# Allegro board XS6-9.brd
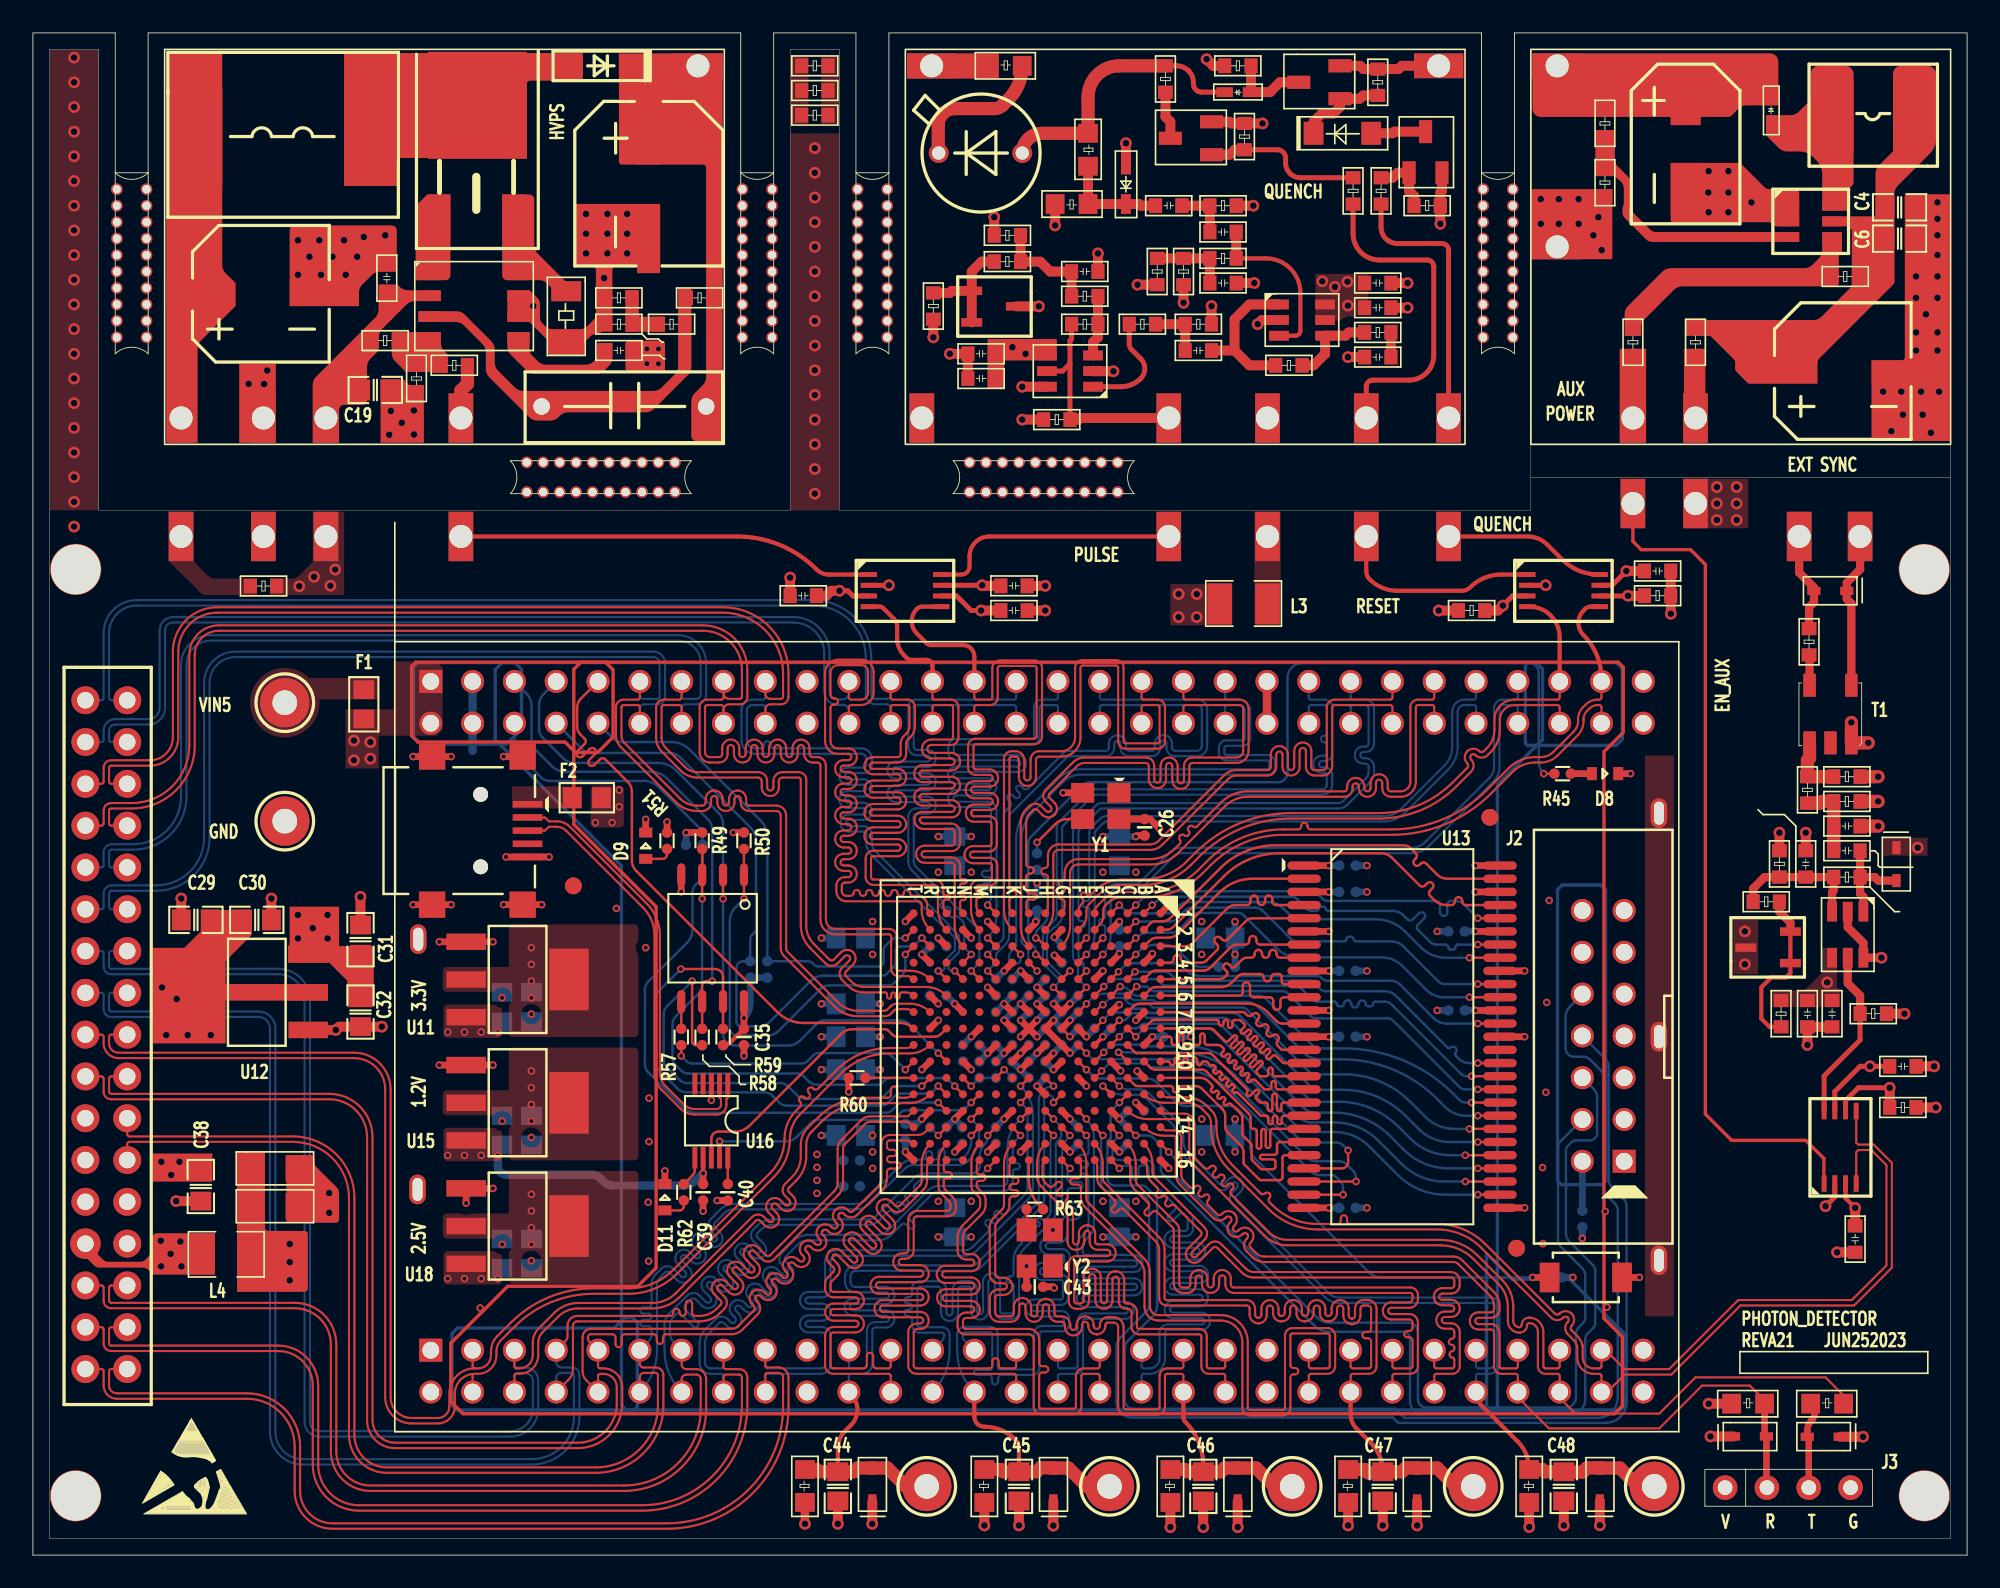
[diagram p0: board, top side]
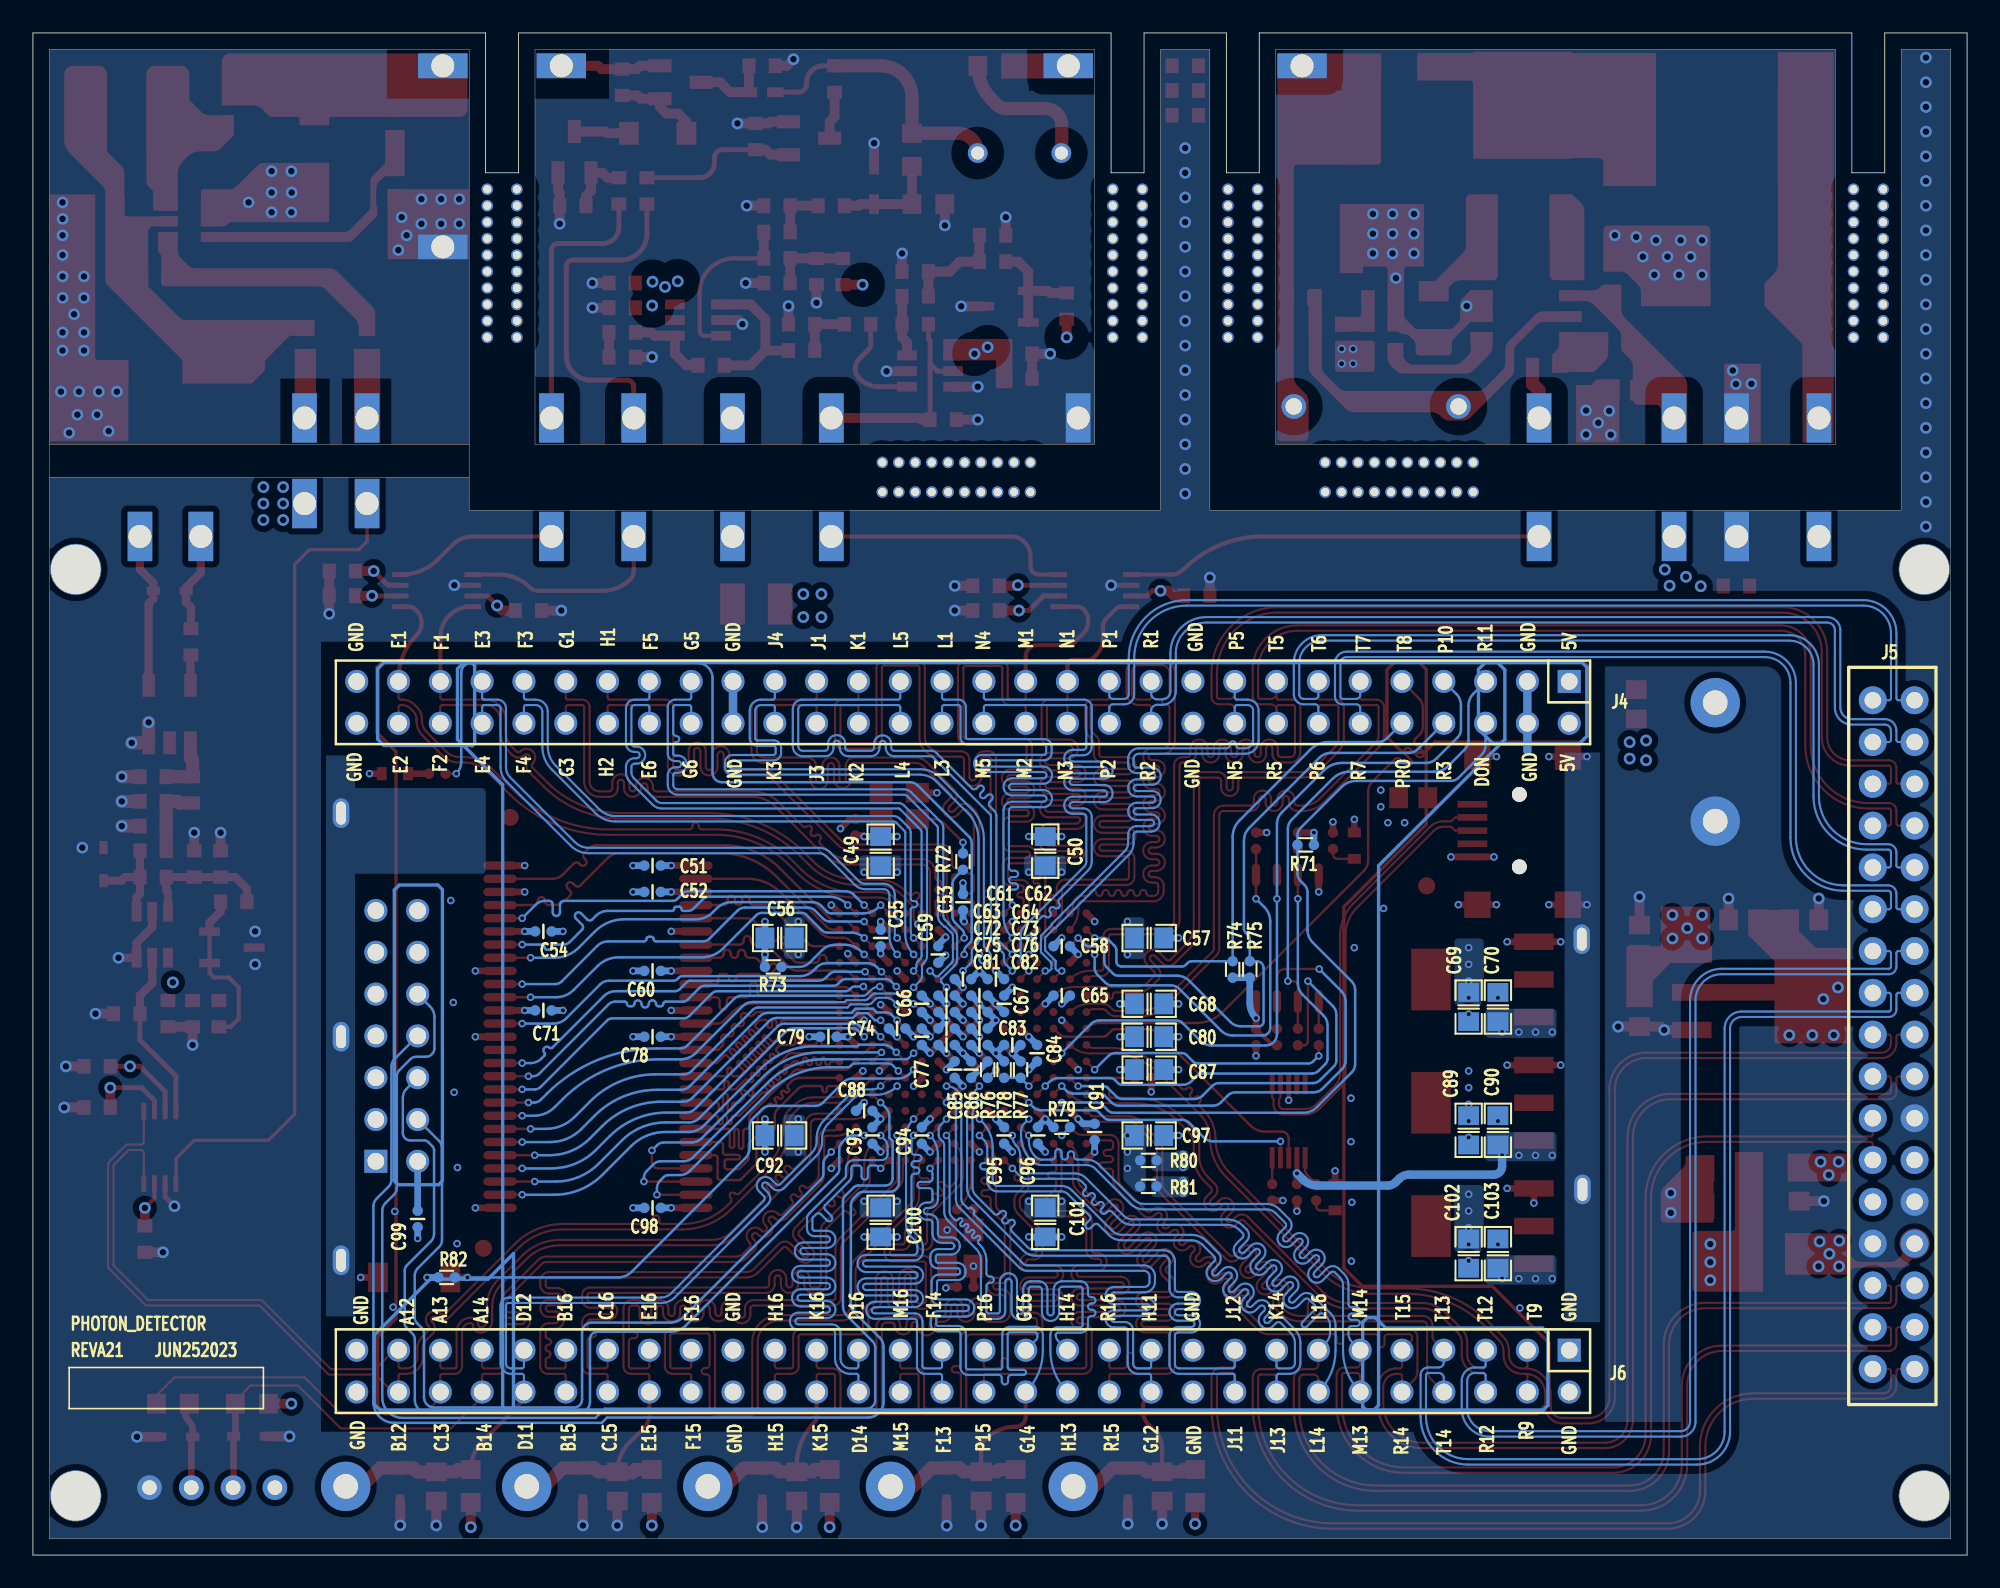
[diagram p1: board, bottom side, seen from below]

Outline 117.5 x 92.5 mm; copper layers: TOP, L2_GND, L3_P, BOTTOM. Coordinates in mm from the lower left corner of the outline.
Outline path: 0,92.5 5,92.5 5,84 7,84 7,92.5 43,92.5 43,84 45,84 45,92.5 50,92.5 50,84 52,84 52,92.5 88,92.5 88,84 90,84 90,92.5 117.5,92.5 117.5,0 0,0 0,92.5

## Design rules (mm)
constraint set DEFAULT: min track width 0.147, pair gap 0.102
net group DP_L34_3: nets EN_HVPS_IO N3_L34P_3
net group DP_USB: nets USB_DM USB_DP
net group NG_SDRAM_D8-15: nets SDRAM_DQ8 SDRAM_DQ9 SDRAM_DQ10 SDRAM_DQ11 SDRAM_DQ12 SDRAM_DQ13 SDRAM_DQ14 SDRAM_DQ15 SDRAM_UDQM

## Placement (name value [footprint] x y rotation side)
C1  100uF/35V  [CAP-SMD-L6D6-W6D6-P5D5-MM]  100.4 88.5 270 top
C2  4.7uF/400V  [CAP-SMD-D8D0-L10D3-B8D3]  37.4 86.6 270 top
C3  0.1uF/16V  [C0603]  69.8 82 180 top
C4  10uF/35V  [C0805]  113.4 81.9 0 top
C5  0.1uF/16V  [C0603]  73.1 80.4 180 top
C6  10uF/35V  [C0805]  113.4 80 0 top
C7  0.1uF/16V  [C0603]  63.1 78 0 top
C8  0.1uF/35V  [C0603]  21.5 76.8 90 top
C9  0.1uF/16V  [C0603]  71.5 77.3 0 top
C10  10uF/16V  [C0603]  80.9 77.3 0 top
C11  220uF/35V  [CAP-SMD-D8D0-L8D3-W8D3-P7D5]  10.2 76.6 0 top
C12  0.1uF/16V  [C0603]  80.9 75.8 0 top
C13  0.1uF/35V  [C0603]  34.8 73.2 0 top
C14  0.1uF/16V  [C0603]  70 73.2 0 top
C15  10uF/16V  [C0603]  58.4 73 180 top
C16  0.1uF/16V  [C0603]  82.5 72.8 180 top
C17  220uF/35V  [CAP-SMD-D8D0-L8D3-W8D3-P7D5]  106.3 71.9 0 top
C18  0.1uF/16V  [C0603]  58.4 71.5 180 top
C19  10uF/35V  [C0805]  20.8 70.8 0 top
C20  0.1uF/400V  [CAP-THR-L11D4-W3D8-P10D0-D0D8]  40.9 69.8 180 top
C21  0.1uF/16V  [C0603]  99.5 59.8 180 top
C22  0.1uF/16V  [C0603]  60.4 58.9 180 top
C23  0.1uF/16V  [C0603]  47.6 58.3 180 top
C24  0.1uF/16V  [C0603]  58.8 57.4 0 top
C25  0.1uF/16V  [C0603]  111 44.3 180 top
C26  100nF  [C0402]  67.54 44.22 270 top
C27  0.1uF/16V  [C0603]  111 42.8 180 top
C28  0.1uF/16V  [C0603]  107.7 41.2 90 top
C29  22uF/6.3V  [C0805]  9.9 38.6 180 top
C30  22uF/6.3V  [C0805]  13.6 38.6 0 top
C31  10uF/10V  [C0805]  19.9 37.4 90 top
C32  10uF/10V  [C0805]  19.9 33 270 top
C33  10uF/16V  [C0603]  107.8 32.1 90 top
C34  0.1uF/16V  [C0603]  109.3 32.1 90 top
C35  100nF  [C0402]  43.2 31.48 270 top
C36  0.1uF/16V  [C0603]  114.4 29.7 180 top
C37  47uF/10V  [C1206]  13.1 22.7 0 top
C38  22uF/6.3V  [C0805]  10.2 22.4 270 top
C39  100nF  [C0402]  40.71 22.05 270 top
C40  100nF  [C0402]  42.21 22.05 270 top
C41  47uF/10V  [C1206]  13.1 20.4 0 top
C42  0.1uF/16V  [C0603]  110.7 20 270 top
C43  100nF  [C0402]  60.86 16.31 0 top
C44  0.1uF/16V  [C0805]  48.9 4.18 270 top
C45  0.1uF/16V  [C0805]  59.9 4.18 270 top
C46  0.1uF/16V  [C0805]  71.1 4.18 270 top
C47  0.1uF/16V  [C0805]  82 4.18 270 top
C48  0.1uF/16V  [C0805]  93 4.18 270 top
C49  10uF  [C0805]  66 42.78 90 bottom
C50  10uF  [C0805]  56 42.78 90 bottom
C51  100nF  [C0402]  79.86 41.9 0 bottom
C52  100nF  [C0402]  79.86 40.3 0 bottom
C53  100nF  [C0402]  61 39.67 90 bottom
C54  100nF  [C0402]  86.49 37.9 180 bottom
C55  100nF  [C0402]  66 37.5 270 bottom
C56  10uF  [C0805]  72.14 37.5 0 bottom
C57  10uF  [C0805]  49.69 37.5 180 bottom
C58  100nF  [C0402]  55 37 0 bottom
C59  100nF  [C0402]  62.5 36.5 90 bottom
C60  100nF  [C0402]  79.86 35.5 0 bottom
C61  100nF  [C0402]  61 35 180 bottom
C62  100nF  [C0402]  59 35 0 bottom
C63  100nF  [C0402]  62 34 180 bottom
C64  100nF  [C0402]  60 34 180 bottom
C65  100nF  [C0402]  55 34 180 bottom
C66  100nF  [C0402]  63.5 33.5 270 bottom
C67  100nF  [C0402]  58.5 33.5 270 bottom
C68  10uF  [C0805]  49.69 33.5 180 bottom
C69  22uF/6.3V  [C0805]  30.28 33.31 270 bottom
C70  10uF/10V  [C0805]  28.5 33.31 90 bottom
C71  100nF  [C0402]  86.49 33.1 180 bottom
C72  100nF  [C0402]  62 33 180 bottom
C73  100nF  [C0402]  60 33 0 bottom
C74  100nF  [C0402]  65 32 0 bottom
C75  100nF  [C0402]  62 32 180 bottom
C76  100nF  [C0402]  60 32 0 bottom
C77  100nF  [C0402]  63.5 31.5 90 bottom
C78  100nF  [C0402]  79.86 31.5 0 bottom
C79  100nF  [C0402]  69.17 31.5 0 bottom
C80  10uF  [C0805]  49.69 31.5 180 bottom
C81  100nF  [C0402]  62 31 180 bottom
C82  100nF  [C0402]  60 31 180 bottom
C83  100nF  [C0402]  58 31 0 bottom
C84  100nF  [C0402]  56.5 30.5 90 bottom
C85  100nF  [C0402]  61.5 29.5 270 bottom
C86  100nF  [C0402]  60.5 29.5 90 bottom
C87  10uF  [C0805]  49.69 29.5 180 bottom
C88  100nF  [C0402]  67 27 180 bottom
C89  22uF/6.3V  [C0805]  30.28 25.81 270 bottom
C90  10uF/10V  [C0805]  28.5 25.81 90 bottom
C91  100nF  [C0402]  53 25.71 270 bottom
C92  10uF  [C0805]  72.14 25.5 0 bottom
C93  100nF  [C0402]  66.5 25.5 90 bottom
C94  100nF  [C0402]  63.5 25.5 270 bottom
C95  100nF  [C0402]  58.5 25.5 270 bottom
C96  100nF  [C0402]  56.45 25.5 90 bottom
C97  10uF  [C0805]  49.69 25.5 180 bottom
C98  100nF  [C0402]  79.86 21.1 0 bottom
C99  100nF  [C0402]  94.13 20.43 270 bottom
C100  10uF  [C0805]  66 20.22 270 bottom
C101  10uF  [C0805]  56 20.22 270 bottom
C102  22uF/6.3V  [C0805]  30.28 18.32 270 bottom
C103  10uF/10V  [C0805]  28.5 18.32 90 bottom
D1  E1G  [SOD-123FL]  36.3 90.5 180 top
D2  BAS521-7  [SOD-523-L1D2-W0D8-P1D6-MM]  72.4 88.9 0 top
D3  BAS521-7  [SOD-523-L1D2-W0D8-P1D6-MM]  105.6 88.6 270 top
D4  MMSZ12T1G  [SOD-123-L2D8-W1D8-P3D5-MM]  77.8 86.4 0 top
D5  SAPD  [SAPD-THR-2P]  57.6 85.2 180 top
D6  PTVSLC3D3V3B  [SOD323-L1D8-W1D3-P2D4-MM]  66.4 84.5 270 top
D7  PTVSLC3D5VB  [SOD-323]  109.2 58.6 180 top
D8  GREEN  [Q0603]  95.51 47.49 0 top
D9  GREEN  [Q0603]  37.23 43.11 90 top
D10  PTVSLC3D3V3B  [SOD-323]  113.2 42 270 top
D11  GREEN  [Q0603]  38.39 21.75 90 top
D12  PTVSLC3D3V3B  [SOD-323]  104.3 7.2 0 top
D13  PTVSLC3D3V3B  [SOD-323]  108.8 7.2 180 top
D14  PTVSLC3D3V3B  [SOD-323]  51 4.28 90 top
D15  PTVSLC3D3V3B  [SOD-323]  62 4.28 90 top
D16  PTVSLC3D3V3B  [SOD-323]  73.2 4.28 90 top
D17  PTVSLC3D3V3B  [SOD-323]  84.1 4.28 90 top
D18  PTVSLC3D3V3B  [SOD-323]  95.2 4.28 90 top
F1  400mA  [F0805]  20.1 51.7 90 top
F2  400mA  [F0805]  33.65 46.02 0 top
J1  MINI USB  [MINIUSB-AB-SM]  21.3 44.02 270 top
J2  CONN RCPT 7x2  [DIP2X7_2P54]  96.67 23.93 90 top
J3  Header1x4  [SIP-4-2D54MM]  102.8 4.1 0 top
J4  CONN PLUG 30x2  [DIP2X30_2P54]  24.17 53.09 0 bottom
J5  Header-17x2  [DIP-17X2-2D54MM]  3.19 51.95 270 bottom
J6  CONN PLUG 30x2  [DIP2X30_2P54]  24.17 12.45 0 bottom
L1  47uH/1A  [IND-SMD-L5D0-W5D0-P4D6-MM]  114.1 87.5 180 top
L2  100uH/2A  [IND-SMD-L11D5-W10D0-P10D4]  10 86.2 0 top
L3  10uH/300mA  [L1210]  75.1 59.1 180 top
L4  10uH/300mA  [L1210]  10.2 17 0 top
NOREF  -  [unnamed]  51 83 270 top
NOREF#2  -  [#2]  33.55 75.17 90 top
NOREF#3  -  [#2]  0 0 0 top
NOREF#4  -  [#2]  32.7 90.5 0 top
NOREF#5  -  [unnamed]  30 65.5 0 top
NOREF#6  -  [unnamed#3]  2.6 59.9 0 top
NOREF#7  -  [#2]  40.8 82.1 90 top
NOREF#8  -  [#2]  106.3 71.9 0 top
NOREF#9  -  [unnamed]  89 83 270 top
NOREF#10  -  [#2]  114.9 3.6 90 top
NOREF#11  -  [#2]  117.5 0 90 top
NOREF#12  -  [#2]  105.8 70.05 0 top
NOREF#13  -  [#2]  24.66 81.28 0 top
NOREF#14  -  [unnamed#3]  2.6 3.6 0 top
NOREF#15  -  [unnamed]  56.9 65.5 0 top
NOREF#16  -  [#2]  111.4 67.8 90 top
NOREF#17  -  [unnamed#4]  90.13 18.65 0 top
NOREF#18  -  [#2]  116.04 60.87 0 top
NOREF#19  -  [#2]  2.6 3.6 0 top
NOREF#20  -  [unnamed#4]  88.51 44.84 0 top
NOREF#21  -  [unnamed#3]  114.9 3.6 0 top
NOREF#22  -  [#2]  37.4 80 90 top
NOREF#23  -  [#2]  35.7 84.9 0 top
NOREF#24  -  [unnamed]  6 83 270 top
NOREF#25  -  [#2]  32.4 72.9 90 top
NOREF#26  -  [#2]  24.66 81.28 0 top
NOREF#27  -  [#2]  97.83 12.45 90 top
NOREF#28  -  [#2]  15.3 72.5 90 top
NOREF#29  -  [unnamed#3]  114.9 59.9 0 top
NOREF#30  -  [#2]  9.7 74.75 0 top
NOREF#31  -  [unnamed#4]  32.83 40.67 0 top
NOREF#32  -  [unnamed]  44 83 270 top
NOREF#33  -  [#2]  32.4 73.8 90 top
NOREF#34  -  [#2]  10.2 76.6 0 top
NOREF#35  -  [#2]  152.35 60.76 180 bottom
Q1  AO3401A  [SOT-23-3-L2D9-W1D3-P1D9-MM]  79.4 90.5 0 top
Q2  FH3400C  [SOT-23-3-L2D9-W1D3-P1D9-MM]  71.6 87.1 0 top
Q3  AOD458  [TO-252-2-DPAK]  27 88.1 90 top
Q4  FH3400C  [SOT-23-3-L2D9-W1D3-P1D9-MM]  85.6 84 270 top
R1  0  [R0603]  46.7 90.5 0 top
R2  0  [R0805]  60.1 90.5 180 top
R3  1M  [R0603]  72.4 90.5 0 top
R4  0  [R0603]  68.8 88.9 90 top
R5  1K  [R0603]  81.7 90.3 270 top
R6  0  [R0603]  46.7 89 0 top
R7  0  [R0603]  46.7 87.5 0 top
R8  182K  [R0603]  95.5 87.8 270 top
R9  1K  [R0603]  73.6 85.4 90 top
R10  332K  [R0805]  64.1 84.4 90 top
R11  10K  [R0603]  95.5 84.2 270 top
R12  100  [R0603]  80.2 82.1 90 top
R13  100  [R0603]  81.9 82.1 90 top
R14  100K  [R0805]  62.1 82.1 0 top
R15  100K  [R0603]  71.5 82 0 top
R16  1K  [R0603]  83.9 82 0 top
R17  682  [R0603]  60 80.2 180 top
R18  100K  [R0603]  73.1 78.8 180 top
R19  4.99K  [R0603]  58.4 78.6 0 top
R20  4.99K  [R0603]  68.3 78.8 270 top
R21  4.99K  [R0603]  69.9 77.2 90 top
R22  10K  [R0603]  110.9 77.7 180 top
R23  1K  [R0603]  64.7 76.5 180 top
R24  DNP  [R0603]  36.4 76.4 180 top
R25  1.5M  [R0603]  41.3 76.4 180 top
R26  499  [R0603]  54.7 75.1 90 top
R27  50mR  [R1206]  32.4 76.8 270 top
R28  10K  [R0603]  36.4 74.8 180 top
R29  0  [R0603]  39.6 74.8 180 top
R30  10K  [R0603]  63.1 74.8 0 top
R31  0  [R0603]  66.6 74.8 0 top
R32  100K  [R0603]  71.6 74.8 180 top
R33  100K  [R0603]  82.5 74.3 180 top
R34  DNP  [R0603]  20.6 73.8 0 top
R35  0  [R0603]  97.2 72.9 90 top
R36  0  [R0603]  101 72.9 90 top
R37  DNP  [R0603]  26.4 72.3 180 top
R38  4.99K  [R0603]  75.5 72.3 0 top
R39  0  [R0603]  23.3 70.7 90 top
R40  10K  [R0603]  63 69 180 top
R41  0  [R0603]  14.81 58.89 180 top
R42  1K  [R0603]  97.9 58.3 0 top
R43  1K  [R0603]  88.2 57.4 180 top
R44  0  [R0603]  107.9 56.3 270 top
R45  1K  [R0402]  92.93 47.49 180 top
R46  50  [R0603]  111 47.3 180 top
R47  0  [R0603]  107.8 45.7 90 top
R48  DNP  [R0603]  111 45.8 180 top
R49  4.7K  [R0402]  40.66 43.41 90 top
R50  2.4K  [R0402]  43.2 43.41 90 top
R51  680R  [R0402]  38.52 43.41 270 top
R52  682  [R0603]  106.1 41.2 90 top
R53  10K  [R0603]  111 41.2 180 top
R54  4.99K  [R0603]  106.1 39.7 180 top
R55  499  [R0603]  106.2 33.7 270 top
R56  10K  [R0603]  111 32.9 0 top
R57  33R  [R0402]  39.39 31.48 90 top
R58  33R  [R0402]  40.66 31.48 90 top
R59  4.7K  [R0402]  41.93 31.48 270 top
R60  1K  [R0402]  50.06 29 180 top
R61  1K  [R0603]  112.8 27.2 0 top
R62  680R  [R0402]  39.54 22.05 270 top
R63  33R  [R0402]  60.86 21.01 180 top
R64  10K  [R0805]  105.2 9.2 180 top
R65  1K  [R0805]  110 9.2 180 top
R66  10K  [R0805]  46.9 5.2 270 top
R67  10K  [R0805]  57.8 5.2 270 top
R68  10K  [R0805]  69.1 5.2 270 top
R69  10K  [R0805]  79.9 5.2 270 top
R70  10K  [R0805]  90.9 5.2 270 top
R71  330R  [R0402]  40.18 43.16 180 bottom
R72  33R  [R0402]  61 42.14 90 bottom
R73  100R  [R0402]  72.53 35.74 0 bottom
R74  4.7K  [R0402]  44.62 35.59 270 bottom
R75  4.7K  [R0402]  43.58 35.59 270 bottom
R76  4.7K  [R0402]  59.5 29.5 90 bottom
R77  1K/NC  [R0402]  57.5 29.5 90 bottom
R78  1K  [R0402]  58.5 29.5 270 bottom
R79  4.7K  [R0402]  55 26 180 bottom
R80  0R/NC  [R0402]  49.74 23.99 180 bottom
R81  0R  [R0402]  49.74 22.41 180 bottom
R82  1K  [R0402]  92.37 16.87 180 bottom
S1  FSMRA2JH  [SMD_3X4X2MM]  94.34 16.87 0 top
T1  ETC1-1T-2TR  [SM-22]  111.1 53 180 top
T2  TPAD_015  [TP_OBL1_4X0_6]  98.78 45.08 90 top
T3  TPAD_015  [TP_OBL1_4X0_6]  23.41 37.43 90 top
T4  TPAD_015  [TP_OBL1_4X0_6]  98.78 31.5 90 top
T5  TPAD_015  [TP_OBL1_4X0_6]  23.37 22.22 90 top
T6  TPAD_015  [TP_OBL1_4X0_6]  98.78 17.91 90 top
TP1  T POINT F  [STAMP_HOLE_1D5X3D0_1D4]  40.4 90.5 270 top
TP2  T POINT F  [STAMP_HOLE_1D5X3D0_1D4]  54.6 90.5 90 top
TP3  T POINT F  [STAMP_HOLE_1D5X3D0_1D4]  85.4 90.5 270 top
TP4  T POINT F  [STAMP_HOLE_1D5X3D0_1D4]  92.6 90.5 90 top
TP5  T POINT F  [STAMP_HOLE_1D5X3D0_1D4]  92.6 79.5 90 top
TP6  T POINT F  [STAMP_HOLE_1D5X3D0_1D4]  9 69.1 180 top
TP7  T POINT F  [STAMP_HOLE_1D5X3D0_1D4]  14 69.1 180 top
TP8  T POINT F  [STAMP_HOLE_1D5X3D0_1D4]  17.8 69.1 180 top
TP9  T POINT F  [STAMP_HOLE_1D5X3D0_1D4]  26 69.1 180 top
TP10  T POINT F  [STAMP_HOLE_1D5X3D0_1D4]  54 69.1 180 top
TP11  PULSE  [STAMP_HOLE_1D5X3D0_1D4]  69 69.1 180 top
TP12  T POINT F  [STAMP_HOLE_1D5X3D0_1D4]  75 69.1 180 top
TP13  RESET  [STAMP_HOLE_1D5X3D0_1D4]  81 69.1 180 top
TP14  QUENCH  [STAMP_HOLE_1D5X3D0_1D4]  86 69.1 180 top
TP15  T POINT F  [STAMP_HOLE_1D5X3D0_1D4]  97.2 69.1 180 top
TP16  T POINT F  [STAMP_HOLE_1D5X3D0_1D4]  101 69.1 180 top
TP17  T POINT F  [STAMP_HOLE_1D5X3D0_1D4]  97.2 63.9 0 top
TP18  T POINT F  [STAMP_HOLE_1D5X3D0_1D4]  101 63.9 0 top
TP19  T POINT F  [STAMP_HOLE_1D5X3D0_1D4]  9 61.9 0 top
TP20  T POINT F  [STAMP_HOLE_1D5X3D0_1D4]  14 61.9 0 top
TP21  T POINT F  [STAMP_HOLE_1D5X3D0_1D4]  17.8 61.9 0 top
TP22  T POINT F  [STAMP_HOLE_1D5X3D0_1D4]  26 61.9 0 top
TP23  QUENCH  [STAMP_HOLE_1D5X3D0_1D4]  69 61.9 0 top
TP24  T POINT F  [STAMP_HOLE_1D5X3D0_1D4]  75 61.9 0 top
TP25  QUENCH  [STAMP_HOLE_1D5X3D0_1D4]  81 61.9 0 top
TP26  QUENCH  [STAMP_HOLE_1D5X3D0_1D4]  86 61.9 0 top
TP27  T POINT F  [STAMP_HOLE_1D5X3D0_1D4]  107.3 61.9 0 top
TP28  T POINT F  [STAMP_HOLE_1D5X3D0_1D4]  111 61.9 0 top
TP29  GND  [TP_THR_CIR_3D0_1D5]  15.3 51.8 0 top
TP30  GND  [TP_THR_CIR_3D0_1D5]  15.3 44.6 0 top
TP31  GND  [TP_THR_CIR_3D0_1D5]  54.3 4.18 0 top
TP32  GND  [TP_THR_CIR_3D0_1D5]  65.4 4.18 0 top
TP33  GND  [TP_THR_CIR_3D0_1D5]  76.5 4.18 0 top
TP34  GND  [TP_THR_CIR_3D0_1D5]  87.5 4.18 0 top
TP35  GND  [TP_THR_CIR_3D0_1D5]  98.5 4.18 0 top
U1  MAX5026EUT-T  [SOT23-6]  108 81.1 270 top
U2  MAX1771ESA+  [SO-8]  29.5 77.8 270 top
U3  TL431  [SOT-23-3-TL431]  56.6 77.3 270 top
U4  OPA357AIDBVR  [SOT-23-6-L2D9-W1D6-PD0D95-CD2D8-MM]  75.7 76 0 top
U5  TLV3501AIDBVR  [SOT-23-6-L2D9-W1D6-PD0D95-CD2D8-MM]  64.4 71 180 top
U6  TXS0102DCUR  [VSSOP-8]  53 58.6 270 top
U7  TXS0102DCUR  [VSSOP-8]  93 58.6 270 top
U8  TLV3501AIDBVR  [SOT-23-6-L2D9-W1D6-PD0D95-CD2D8-MM]  111.2 39.1 270 top
U9  W25Q16FVSIG  [SOIC8_1P27_208MIL]  41.29 37.48 270 top
U10  TL431  [SOT-23-3-TL431]  107.2 35.5 90 top
U11  AMS1117-3.3  [SOT-223]  29.44 34.98 270 top
U12  AMS1117-3.3  [SOT-223]  13.6 34.2 90 top
U13  W9812G6KH-6  [TSOP54-400]  77.22 41.9 270 top
U14  xc6slx25ftg256  [FTG256]  61 31.5 270 top
U15  AMS1117-1.2  [SOT-223]  29.44 27.49 270 top
U16  CH340E  [MSOP10]  41.21 26.39 270 top
U17  TXS0102DCUR  [VSSOP-8]  109.8 24.8 0 top
U18  AMS1117-2.5  [SOT-223]  29.44 19.99 270 top
Y1  50MHz  [OSC3225]  64.87 45.52 180 top
Y2  TBD  [OSC3225]  61.16 18.66 90 top

## Library data of the parts
C1 C2 C11 C17 C20 = C
C3-C10 C12-C16 C18 C19 C21-C25 C27 C28 C33 C34 C36 C37 C41 C42 C44-C48 = CAP NP
C26 C43 = CAP_0: room: PHY&FPGA
C29-C32 C35 C38-C40 C49-C103 = CAP_NP
D1-D3 D5 = DIODE
D4 = DIODE ZENER
D6 D7 D10 D12-D18 = DIODE SCHOTTKY
D8 D9 D11 = LED: room: POWER
F1 F2 = FUSE
J1 = USB_MINI_AB_RECEPTACLE: Tolerance: #TOL; User Part Number: HAMP
J2 = CONN RCPT 7x2/SM_1
J3 = Header1x4
J4 J6 = CONN PLUG 30x2
J5 = Header-17x2
L1-L4 = INDUCTOR
Q1 = BSP316P_0
Q2 Q4 = FH3400C
Q3 = IRF644PbF
R1-R44 R46-R48 R52-R56 R61 R64-R70 = R
R45 R49-R51 R57-R60 R62 R63 R71-R82 = SMALL R1
S1 = SWITCH_2: User Part Number: partnum; Tolerance: RichardLC; room: CPU
T1 = ETC1-1T-2TR
T2-T6 = TESTLOOP
TP1-TP35 = T POINT F
U1 = MAX5026EUT-T
U2 = MAX1771ESA+
U3 U10 = TL431/TI
U4 = OPA357AIDBVR
U5 U8 = TLV3501AIDBVR
U6 U7 U17 = TXS0102DCUR
U9 = EPCS1SI8N_0
U11 U12 U15 U18 = AMS1117
U13 = K4S561632C-TC75_0
U14 = xc6slx25ftg256
U16 = CH340E
Y1 Y2 = OSCILLATOR_0: room: PHY&FPGA

## Footprints (pads in the part's own frame, mm; a bottom-side part is the same pattern mirrored in y, then rotated)
C0402
  round 0.635 smd: 1(-0.5,0) 2(0.5,0)
C0603
  rect 0.8x0.9 smd: 1(0,0) 2(1.6,0)
C0805
  rect 1.141x1.27 smd: 1(-0.889,0) 2(0.889,0)
C1206
  rect 1.5x1.6 smd: 1(0.2,0.8) 2(3,0.8)
CAP-SMD-D8D0-L8D3-W8D3-P7D5
  rect 4.2x1.4 smd: 1(0,0) 2(7.5,0)
CAP-SMD-D8D0-L10D3-B8D3
  rect 4.2x1.4 smd: 1(0,0) 2(6.6,0)
CAP-SMD-L6D6-W6D6-P5D5-MM
  rect 3.2x1.8 smd: 1(0,0) 2(5.5,0)
CAP-THR-L11D4-W3D8-P10D0-D0D8
  round 1.5 hole 1: 1(0,0) 2(10,0)
DIP2X7_2P54
  rect 1.399x1.399 hole 1.021: 1(0,0)
  round 1.399 hole 1.021: 2(0,2.54) 3(2.54,0) 4(2.54,2.54) 5(5.08,0) 6(5.08,2.54) 7(7.62,0) 8(7.62,2.54) 9(10.16,0) 10(10.16,2.54) 11(12.7,0) 12(12.7,2.54) 13(15.24,0) 14(15.24,2.54)
DIP2X30_2P54
  rect 1.399x1.399 hole 1.021: 1(0,0)
  round 1.399 hole 1.021: 2(0,2.54) 3(2.54,0) 4(2.54,2.54) 5(5.08,0) 6(5.08,2.54) 7(7.62,0) 8(7.62,2.54) 9(10.16,0) 10(10.16,2.54) 11(12.7,0) 12(12.7,2.54) 13(15.24,0) 14(15.24,2.54) 15(17.78,0) 16(17.78,2.54) 17(20.32,0) 18(20.32,2.54) 19(22.86,0) 20(22.86,2.54) 21(25.4,0) 22(25.4,2.54) 23(27.94,0) 24(27.94,2.54) 25(30.48,0) 26(30.48,2.54) 27(33.02,0) 28(33.02,2.54) 29(35.56,0) 30(35.56,2.54) 31(38.1,0) 32(38.1,2.54) 33(40.64,0) 34(40.64,2.54) 35(43.18,0) 36(43.18,2.54) 37(45.72,0) 38(45.72,2.54) 39(48.26,0) 40(48.26,2.54) 41(50.8,0) 42(50.8,2.54) 43(53.34,0) 44(53.34,2.54) 45(55.88,0) 46(55.88,2.54) 47(58.42,0) 48(58.42,2.54) 49(60.96,0) 50(60.96,2.54) 51(63.5,0) 52(63.5,2.54) 53(66.04,0) 54(66.04,2.54) 55(68.58,0) 56(68.58,2.54) 57(71.12,0) 58(71.12,2.54) 59(73.66,0) 60(73.66,2.54)
DIP-17X2-2D54MM
  round 1.7 hole 1: 1(0,-2.54) 2(0,0) 3(2.54,-2.54) 4(2.54,0) 5(5.08,-2.54) 6(5.08,0) 7(7.62,-2.54) 8(7.62,0) 9(10.16,-2.54) 10(10.16,0) 11(12.7,-2.54) 12(12.7,0) 13(15.24,-2.54) 14(15.24,0) 15(17.78,-2.54) 16(17.78,0) 17(20.32,-2.54) 18(20.32,0) 19(22.86,-2.54) 20(22.86,0) 21(25.4,-2.54) 22(25.4,0) 23(27.94,-2.54) 24(27.94,0) 25(30.48,-2.54) 26(30.48,0) 27(33.02,-2.54) 28(33.02,0) 29(35.56,-2.54) 30(35.56,0) 31(38.1,-2.54) 32(38.1,0) 33(40.64,-2.54) 34(40.64,0)
F0805
  rect 1.141x1.27 smd: 1(-0.889,0) 2(0.889,0)
FTG256
  round 0.483 smd: A1(-7.5,7.5) A2(-6.5,7.5) A3(-5.5,7.5) A4(-4.5,7.5) A5(-3.5,7.5) A6(-2.5,7.5) A7(-1.5,7.5) A8(-0.5,7.5) A9(0.5,7.5) A10(1.5,7.5) A11(2.5,7.5) A12(3.5,7.5) A13(4.5,7.5) A14(5.5,7.5) A15(6.5,7.5) A16(7.5,7.5) B1(-7.5,6.5) B2(-6.5,6.5) B3(-5.5,6.5) B4(-4.5,6.5) B5(-3.5,6.5) B6(-2.5,6.5) B7(-1.5,6.5) B8(-0.5,6.5) B9(0.5,6.5) B10(1.5,6.5) B11(2.5,6.5) B12(3.5,6.5) B13(4.5,6.5) B14(5.5,6.5) B15(6.5,6.5) B16(7.5,6.5) C1(-7.5,5.5) C2(-6.5,5.5) C3(-5.5,5.5) C4(-4.5,5.5) C5(-3.5,5.5) C6(-2.5,5.5) C7(-1.5,5.5) C8(-0.5,5.5) C9(0.5,5.5) C10(1.5,5.5) C11(2.5,5.5) C12(3.5,5.5) C13(4.5,5.5) C14(5.5,5.5) C15(6.5,5.5) C16(7.5,5.5) D1(-7.5,4.5) D2(-6.5,4.5) D3(-5.5,4.5) D4(-4.5,4.5) D5(-3.5,4.5) D6(-2.5,4.5) D7(-1.5,4.5) D8(-0.5,4.5) D9(0.5,4.5) D10(1.5,4.5) D11(2.5,4.5) D12(3.5,4.5) D13(4.5,4.5) D14(5.5,4.5) D15(6.5,4.5) D16(7.5,4.5) E1(-7.5,3.5) E2(-6.5,3.5) E3(-5.5,3.5) E4(-4.5,3.5) E5(-3.5,3.5) E6(-2.5,3.5) E7(-1.5,3.5) E8(-0.5,3.5) E9(0.5,3.5) E10(1.5,3.5) E11(2.5,3.5) E12(3.5,3.5) E13(4.5,3.5) E14(5.5,3.5) E15(6.5,3.5) E16(7.5,3.5) F1(-7.5,2.5) F2(-6.5,2.5) F3(-5.5,2.5) F4(-4.5,2.5) F5(-3.5,2.5) F6(-2.5,2.5) F7(-1.5,2.5) F8(-0.5,2.5) F9(0.5,2.5) F10(1.5,2.5) F11(2.5,2.5) F12(3.5,2.5) F13(4.5,2.5) F14(5.5,2.5) F15(6.5,2.5) F16(7.5,2.5) G1(-7.5,1.5) G2(-6.5,1.5) G3(-5.5,1.5) G4(-4.5,1.5) G5(-3.5,1.5) G6(-2.5,1.5) G7(-1.5,1.5) G8(-0.5,1.5) G9(0.5,1.5) G10(1.5,1.5) G11(2.5,1.5) G12(3.5,1.5) G13(4.5,1.5) G14(5.5,1.5) G15(6.5,1.5) G16(7.5,1.5) H1(-7.5,0.5) H2(-6.5,0.5) H3(-5.5,0.5) H4(-4.5,0.5) H5(-3.5,0.5) H6(-2.5,0.5) H7(-1.5,0.5) H8(-0.5,0.5) H9(0.5,0.5) H10(1.5,0.5) H11(2.5,0.5) H12(3.5,0.5) H13(4.5,0.5) H14(5.5,0.5) H15(6.5,0.5) H16(7.5,0.5) J1(-7.5,-0.5) J2(-6.5,-0.5) J3(-5.5,-0.5) J4(-4.5,-0.5) J5(-3.5,-0.5) J6(-2.5,-0.5) J7(-1.5,-0.5) J8(-0.5,-0.5) J9(0.5,-0.5) J10(1.5,-0.5) J11(2.5,-0.5) J12(3.5,-0.5) J13(4.5,-0.5) J14(5.5,-0.5) J15(6.5,-0.5) J16(7.5,-0.5) K1(-7.5,-1.5) K2(-6.5,-1.5) K3(-5.5,-1.5) K4(-4.5,-1.5) K5(-3.5,-1.5) K6(-2.5,-1.5) K7(-1.5,-1.5) K8(-0.5,-1.5) K9(0.5,-1.5) K10(1.5,-1.5) K11(2.5,-1.5) K12(3.5,-1.5) K13(4.5,-1.5) K14(5.5,-1.5) K15(6.5,-1.5) K16(7.5,-1.5) L1(-7.5,-2.5) L2(-6.5,-2.5) L3(-5.5,-2.5) L4(-4.5,-2.5) L5(-3.5,-2.5) L6(-2.5,-2.5) L7(-1.5,-2.5) L8(-0.5,-2.5) L9(0.5,-2.5) L10(1.5,-2.5) L11(2.5,-2.5) L12(3.5,-2.5) L13(4.5,-2.5) L14(5.5,-2.5) L15(6.5,-2.5) L16(7.5,-2.5) M1(-7.5,-3.5) M2(-6.5,-3.5) M3(-5.5,-3.5) M4(-4.5,-3.5) M5(-3.5,-3.5) M6(-2.5,-3.5) M7(-1.5,-3.5) M8(-0.5,-3.5) M9(0.5,-3.5) M10(1.5,-3.5) M11(2.5,-3.5) M12(3.5,-3.5) M13(4.5,-3.5) M14(5.5,-3.5) M15(6.5,-3.5) M16(7.5,-3.5) N1(-7.5,-4.5) N2(-6.5,-4.5) N3(-5.5,-4.5) N4(-4.5,-4.5) N5(-3.5,-4.5) N6(-2.5,-4.5) N7(-1.5,-4.5) N8(-0.5,-4.5) N9(0.5,-4.5) N10(1.5,-4.5) N11(2.5,-4.5) N12(3.5,-4.5) N13(4.5,-4.5) N14(5.5,-4.5) N15(6.5,-4.5) N16(7.5,-4.5) P1(-7.5,-5.5) P2(-6.5,-5.5) P3(-5.5,-5.5) P4(-4.5,-5.5) P5(-3.5,-5.5) P6(-2.5,-5.5) P7(-1.5,-5.5) P8(-0.5,-5.5) P9(0.5,-5.5) P10(1.5,-5.5) P11(2.5,-5.5) P12(3.5,-5.5) P13(4.5,-5.5) P14(5.5,-5.5) P15(6.5,-5.5) P16(7.5,-5.5) R1(-7.5,-6.5) R2(-6.5,-6.5) R3(-5.5,-6.5) R4(-4.5,-6.5) R5(-3.5,-6.5) R6(-2.5,-6.5) R7(-1.5,-6.5) R8(-0.5,-6.5) R9(0.5,-6.5) R10(1.5,-6.5) R11(2.5,-6.5) R12(3.5,-6.5) R13(4.5,-6.5) R14(5.5,-6.5) R15(6.5,-6.5) R16(7.5,-6.5) T1(-7.5,-7.5) T2(-6.5,-7.5) T3(-5.5,-7.5) T4(-4.5,-7.5) T5(-3.5,-7.5) T6(-2.5,-7.5) T7(-1.5,-7.5) T8(-0.5,-7.5) T9(0.5,-7.5) T10(1.5,-7.5) T11(2.5,-7.5) T12(3.5,-7.5) T13(4.5,-7.5) T14(5.5,-7.5) T15(6.5,-7.5) T16(7.5,-7.5)
IND-SMD-L5D0-W5D0-P4D6-MM
  rect 2.2x4.4 smd: 1(0,0) 2(4.6,0)
IND-SMD-L11D5-W10D0-P10D4
  rect 3x6 smd: 1(0,0) 2(10.4,0)
L1210
  rect 1.5x2.5 smd: 1(0.1,1.3) 2(3,1.3)
MINIUSB-AB-SM
  round 0.9 hole 0.9 unplated: (-2.2,5.9) (2.2,5.9)
  rect 0.4x1.8 smd: 1(-1.6,8.75) 2(-0.8,8.75) 3(0,8.75) 4(0.8,8.75) 5(1.6,8.75)
  rect 1.6x1.6 smd: S1(-4.5,8.45) S2(4.5,8.45) S3(-4.5,2.95) S4(4.5,2.95)
MSOP10
  rect 1.3x0.3 smd: 1(-2.25,1) 2(-2.25,0.5) 3(-2.25,0) 4(-2.25,-0.5) 5(-2.25,-1) 6(2.25,-1) 7(2.25,-0.5) 8(2.25,0) 9(2.25,0.5) 10(2.25,1)
OSC3225
  rect 1.4x1.2 smd: 1(-1.1,-0.8) 2(1.1,-0.8) 3(1.1,0.8) 4(-1.1,0.8)
Q0603
  rect 0.6x0.8 smd: 1(-0.8,0) 2(0.8,0)
R0402
  round 0.635 smd: 1(-0.5,0) 2(0.5,0)
R0603
  rect 0.8x0.9 smd: 1(0,0) 2(1.6,0)
R0805
  rect 1.14x1.2 smd: 1(0,0) 2(2,0)
R1206
  rect 1.2x1.8 smd: 1(0,0) 2(3,0)
SAPD-THR-2P
  round 1.2 hole 0.8: 1(2.576,0) 2(-2.504,0)
SIP-4-2D54MM
  round 1.5 hole 0.89: 1(0,0) 2(2.54,0) 3(5.08,0) 4(7.62,0)
SM-22
  rect 0.76x1.4 smd: 1(0.629,3.642) 2(1.899,3.642) 3(3.169,3.642) 4(3.169,0.142) 5(0.629,0.142)
SMD_3X4X2MM
  rect 1.2x1.8 smd: 1(-2.2,0) 2(2.2,0)
SO-8
  rect 0.65x1.35 smd: 1(0,-5.4) 2(1.27,-5.4) 3(2.54,-5.4) 4(3.81,-5.4) 5(3.81,0) 6(2.54,0) 7(1.27,0) 8(0,0)
SOD323-L1D8-W1D3-P2D4-MM
  rect 1.2x0.6 smd: 1(0,0) 2(2.4,0)
SOD-123-L2D8-W1D8-P3D5-MM
  rect 1.2x1.4 smd: 1(0,0) 2(3.5,0)
SOD-123FL
  rect 1.4x1.2 smd: 1(0,0) 2(3.6,0)
SOD-323
  rect 0.8x0.5 smd: 1(-0.99,0.01) 2(1.01,0.01)
SOD-523-L1D2-W0D8-P1D6-MM
  rect 1x0.6 smd: 1(0,0) 2(1.6,0)
SOIC8_1P27_208MIL
  oval 1.4x0.5 smd: 1(-3.85,1.905) 2(-3.85,0.635) 3(-3.85,-0.635) 4(-3.85,-1.905) 5(3.85,-1.905) 6(3.85,-0.635) 7(3.85,0.635) 8(3.85,1.905)
SOT23-6
  rect 0.6x1.2 smd: 1(-0.9,-1.3) 2(0.05,-1.3) 3(1,-1.3) 4(1,1.3) 5(0.05,1.3) 6(-0.9,1.3)
SOT-23-3-L2D9-W1D3-P1D9-MM
  rect 1.4x0.8 smd: 1(0,-2) 2(0,0) 3(-2.5,-1)
SOT-23-3-TL431
  rect 0.51x1.27 smd: 1(0.476,0.434) 2(1.415,3.142) 3(2.391,0.434)
SOT-23-6-L2D9-W1D6-PD0D95-CD2D8-MM
  rect 1.2x0.6 smd: 1(0,0) 2(0,-0.95) 3(0,-1.9) 4(2.8,-1.9) 5(2.8,-0.95) 6(2.8,0)
SOT-223
  rect 1x2.4 smd: 1(-2.29,-3.125) 2(0,-3.125) 3(2.29,-3.125)
  rect 3.75x2.4 smd: 4(0,3.125)
STAMP_HOLE_1D5X3D0_1D4
  rect 1.5x3 hole 1.4: 1(0,0)
TO-252-2-DPAK
  rect 2.8x1.4 smd: 1(-6.82,2.34) 3(-6.82,-2.21)
  rect 6.5x6 smd: 2(0,0)
TP_OBL1_4X0_6
  oval 1.8x1 hole 1.4x0.6: 1(0,0)
TP_THR_CIR_3D0_1D5
  round 3 hole 1.5: 1(0,0)
TSOP54-400
  oval 0.508x2.032 smd: 1(0,0) 2(0.8,0) 3(1.6,0) 4(2.4,0) 5(3.2,0) 6(4,0) 7(4.8,0) 8(5.6,0) 9(6.4,0) 10(7.2,0) 11(8,0) 12(8.8,0) 13(9.6,0) 14(10.4,0) 15(11.2,0) 16(12,0) 17(12.8,0) 18(13.6,0) 19(14.4,0) 20(15.2,0) 21(16,0) 22(16.8,0) 23(17.6,0) 24(18.4,0) 25(19.2,0) 26(20,0) 27(20.8,0) 28(20.8,11.9) 29(20,11.9) 30(19.2,11.9) 31(18.4,11.9) 32(17.6,11.9) 33(16.8,11.9) 34(16,11.9) 35(15.2,11.9) 36(14.4,11.9) 37(13.6,11.9) 38(12.8,11.9) 39(12,11.9) 40(11.2,11.9) 41(10.4,11.9) 42(9.6,11.9) 43(8.8,11.9) 44(8,11.9) 45(7.2,11.9) 46(6.4,11.9) 47(5.6,11.9) 48(4.8,11.9) 49(4,11.9) 50(3.2,11.9) 51(2.4,11.9) 52(1.6,11.9) 53(0.8,11.9) 54(0,11.9)
unnamed
  round 0.7 hole 0.5 unplated: (0,0.9) (0,-0.9) (1,0.9) (1,-0.9) (2,0.9) (2,-0.9) (3,0.9) (3,-0.9) (4,0.9) (4,-0.9) (5,0.9) (5,-0.9) (6,0.9) (6,-0.9) (7,0.9) (7,-0.9) (8,0.9) (8,-0.9) (9,0.9) (9,-0.9)
unnamed#3
  round 3.1 hole 3 unplated: (0,0)
unnamed#4
  round 1.016 smd: (0,0) (0,0)
VSSOP-8
  rect 0.3x1 smd: 1(-0.985,-2.22) 2(-0.335,-2.22) 3(0.315,-2.22) 4(0.965,-2.22) 5(0.965,2.18) 6(0.315,2.18) 7(-0.335,2.18) 8(-0.985,2.18)

## Nets
5V_HVPS_IN: R41.2 TP19.1(TP)
+1.2V: C63.1 C64.1 C66.1 C68.1 C72.1 C73.1 C75.1 C76.1 C77.1 C80.1 C81.1 C82.1 C87.1 C89.1 U14.G7 U14.G9 U14.H8 U14.H10 U14.J7 U14.J9 U14.K8(VCCINT#K8) U14.K10 U15.2 U15.4(VOUT1)
+2.5V: C102.1 R80.2 U18.2 U18.4(VOUT1)
+3.3V: C23.1 C24.1 C26.1 C35.1 C42.1 C49.1 C50.1 C51.1 C52.1 C53.1 C54.1 C55.1 C56.1 C57.1 C58.1 C59.1 C60.1 C61.1 C62.1 C65.1 C67.1 C69.1 C71.1 C74.1 C78.1 C79.1 C83.1 C84.1 C85.1 C86.1 C88.1 C92.1 C98.1 C99.1 J2.2(VREF) J3.1 R42.1 R43.1 R49.2 R50.2 R59.2 R60.2 R61.1 R64.2 R66.2 R67.2 R68.2 R69.2 R70.2 R71.2 R74.2 R75.2 R76.2 R77.2 R81.2 R82.1 U6.3 U6.6 U7.3 U7.6 U9.8 U11.2 U11.4(VOUT1) U13.1 U13.3 U13.9 U13.14 U13.27 U13.43 U13.49 U14.B4 U14.B9 U14.B13 U14.D2 U14.D7 U14.D10 U14.E5 U14.F8 U14.F11 U14.G4 U14.G10 U14.H6 U14.J2 U14.J10 U14.K4 U14.L6 U14.L9 U14.N2 U14.N7 U14.N10 U14.R4 U14.R8 U17.3 U17.6 Y1.4(VCC)
+5V: C21.2 C22.2 C31.1 C32.1 C33.2 C34.2 C36.2 C37.1 C39.1 C41.1 C70.1 C90.1 C103.1 F1.1 F2.2 J4.1 J4.2 L3.2 L4.2 R41.1 R51.1 R55.1 TP18.1(TP) TP21.1(TP) U6.7(VCCB) U7.7(VCCB) U8.4 U11.3 U12.3 U15.3 U16.7(VCC) U17.7(VCCB) U18.3
GND: C21.1 C22.1 C23.2 C24.2 C25.1 C26.2 C28.2 C29.2 C30.2 C31.2 C32.2 C33.1 C34.1 C35.2 C36.1 C37.2 C38.2 C39.2 C40.2 C41.2 C42.2 C43.2 C44.2 C45.2 C46.2 C47.2 C48.2 C49.2 C50.2 C51.2 C52.2 C53.2 C54.2 C55.2 C56.2 C57.2 C58.2 C59.2 C60.2 C61.2 C62.2 C63.2 C64.2 C65.2 C66.2 C67.2 C68.2 C69.2 C70.2 C71.2 C72.2 C73.2 C74.2 C75.2 C76.2 C77.2 C78.2 C79.2 C80.2 C81.2 C82.2 C83.2 C84.2 C85.2 C86.2 C87.2 C88.2 C89.2 C90.2 C91.2 C92.2 C93.2 C94.2 C95.2 C96.2 C97.2 C98.2 C99.2 C100.2 C101.2 C102.2 C103.2 D8.2(CATHODE) D9.2(CATHODE) D10.1 D11.2(CATHODE) D12.1 D13.1 D14.1 D15.1 D16.1 D17.1 D18.1 J1.5 J1.S1 J1.S2 J1.S3 J1.S4(SHLD4) J2.1 J2.3 J2.5 J2.7 J2.9 J2.11 J2.13 J3.4 J4.3 J4.4 J4.19 J4.20 J4.41 J4.42 J4.59 J4.60 J5.22 J5.26 J5.27 J6.1 J6.2 J6.19 J6.20 J6.41 J6.42 J6.59 J6.60 R42.2 R43.2 R46.1 R48.1 R52.2 R56.2 R61.2 R73.2 R78.1 R79.1 S1.2 T1.1 T2.1(PIN1) T3.1(PIN1) T4.1(PIN1) T5.1(PIN1) T6.1(PIN1) TP20.1(TP) TP30.1(TP) U6.2 U7.2 U8.2(V-) U8.6 U9.4 U10.2 U11.1 U12.1 U13.6 U13.12 U13.28 U13.41 U13.46 U13.52(VSSQ3) U13.54 U14.A1 U14.A16 U14.B7 U14.B11 U14.D4 U14.D13 U14.E9 U14.G2 U14.G8 U14.G15 U14.H7 U14.H9 U14.H12 U14.J5 U14.J8 U14.K7 U14.K9 U14.L2 U14.L15 U14.M8 U14.N13 U14.P3 U14.R6 U14.R10 U14.T1 U14.T16 U15.1 U16.3 U17.2 U18.1 Y1.2 Y2.2
GND_FIELD SIGNAL: C7.2 C9.2 C10.2 C12.2 C15.2 C16.2 C18.2 D6.1 Q2.2(S) Q4.2(S) R3.1 R9.2 R14.1 R15.2 R16.2 R17.2 R21.1 R32.1 R40.2 TP10.1(TP) U3.2 U4.2(V-) U5.2(V-) U5.6
GND_HVPS: C2.2 C8.2 C11.2 C13.2 C19.2 R24.2 R27.2 R28.2 R39.1 TP7.1(TP) U2.6 U2.7
GND_QUENCH: C1.2 C4.2 C6.2 C17.2 R11.2 TP5.1(TP) U1.1 U1.2
V5Q: L3.1 TP24.1(TP)
VCCIO: C43.1 C91.1 C93.1 C94.1 C95.1 C96.1 C97.1 C100.1 C101.1 R80.1 R81.1 U14.D15 U14.G13 U14.J15 U14.K13 U14.N15 U14.R13 Y2.4(VCC)
VDD5_LCD: J5.28 L4.1
VDD5_QUENCH: C10.1 C12.1 C15.1 C18.1 R20.2 R26.1 TP12.1(TP) U4.5 U4.6 U5.4
VDD33: C29.1 C30.1 C38.1 J5.24 J5.25 U12.2 U12.4(VOUT1)
A12_L62N_0: J6.57 U14.A12 U17.4
A13_L63N_0: J6.55 U14.A13
A14_L65N_0: J6.53 U14.A14
AUX_PWR_EN: R35.1 TP15.1(TP)
B12_L62P_0: J6.58 U14.B12 U17.5
B14_L65P_0: D12.2(CATHODE) J3.2 J6.54 R64.1 U14.B14
B15_L29P_1: J6.50 U14.B15
B16_L29N_1: J6.49 U14.B16
C13_L63P_0: J6.56 R65.1 U14.C13
C15_L33P_1: J6.48 U14.C15
C16_L33N_1: J6.47 U14.C16
D11_L66P_0: C48.1 D18.2(CATHODE) J6.52 R70.1 TP35.1(TP) U14.D11
D12_L66N_0: J6.51 U14.D12
D14_L31P_1: J6.36 U14.D14
D16_L31N_1: J6.35 U14.D16
DONE_2: J4.6 R71.1 U14.P13
E1_L46N_3: J4.57 U7.5 U14.E1
E2_L46P_3: J4.58 U14.E2
E3_L54N_3: J4.53 U14.E3
E4_L54P_3: J4.54 U14.E4
E15_L34P_1: C47.1 D17.2(CATHODE) J6.46 R69.1 TP34.1(TP) U14.E15
E16_L34N_1: J6.45 U14.E16
EN: R37.1 TP9.1(TP)
EN_AUX_PWR: TP17.1(TP) U17.1
EN_HVPS: TP22.1(TP) U6.1
EN_HVPS_IO: J4.25 U6.4 U14.N1
F1_L41N_GCLK26_3: J4.55 U7.4 U14.F1
F2_L41P_GCLK27_3: J4.56 U14.F2
F3_L53N_3: J4.51 U14.F3
F4_L53P_3: J4.52 U14.F4
F5_L55N_3: J4.45 U14.F5
F6_L55P_3: J4.46 U14.F6
F10_KEY_0: R82.2 S1.1 U14.F10
F13_L32P_1: J6.32 U14.F13
F14_L32N_1: J6.31 U14.F14
F15_L35P_1: J6.44 U14.F15
F16_L35N_1: J6.43 U14.F16
FPGA_TCK: J2.6 U14.C14
FPGA_TDI: J2.10 U14.C12
FPGA_TDO: J2.8 U14.E14
FPGA_TMS: J2.4 U14.A15
G1_L40N_3: J4.49 U14.G1
G3_L40P_3: J4.50 U14.G3
G5_L51N_3: J4.43 U14.G5
G6_L51P_3: J4.44 U14.G6
G12_L38P_1: C44.1 D14.2(CATHODE) J6.22 R66.1 TP31.1(TP) U14.G12
G14_L36P_1: C45.1 D15.2(CATHODE) J6.28 R67.1 TP32.1(TP) U14.G14
G16_L36N_1: J6.27 U14.G16
H1_L39N_3: J4.47 U14.H1
H2_L39P_3: J4.48 U14.H2
H3_50MHZ_CLK: R72.1 U14.H3
H4_LED_3: R45.2 U14.H4
H11_L38N_1: J6.21 U14.H11
H13_L39P_1: J6.26 U14.H13
H14_L39N_1: J6.25 U14.H14
H15_L37P_1: J6.40 U14.H15
H16_L37N_1: J6.39 U14.H16
HV+: C2.1 C20.1 D1.1(K) R25.1 TP1.1(TP)
J1_L38N_3: J4.37 U14.J1
J3_L38P_3: J4.38 U14.J3
J4_L42N_GCLK24_3: J4.39 U14.J4
J11_L40P_GCLK11_1: J5.33 J6.18 U14.J11
J12_L40N_GCLK10_1: J5.34 J6.17 U14.J12
J13_L41P_GCLK9_1: J5.31 J6.16 U14.J13
J16_RFU_CLK: R63.1 U14.J16
K1_L37N_3: J4.35 U14.K1
K2_L37P_3: J4.36 U14.K2
K3_L42P_GCLK25_3: J4.40 U14.K3
K14_L41N_GCLK8_1: J5.32 J6.15 U14.K14
K15_L44P_1: C46.1 D16.2(CATHODE) J6.38 R68.1 TP33.1(TP) U14.K15
K16_L44N_1: J6.37 U14.K16
L1_L36N_3: J4.31 U14.L1
L3_L36P_3: J4.32 U14.L3
L4_L45P_3: J4.34 U14.L4
L5_L45N_3: J4.33 U14.L5
L14_L47P_1: J5.29 J6.14 U14.L14
L16_L47N_1: J5.30 J6.13 U14.L16
M1_L35N_3: J4.27 U6.5 U14.M1
M2_L35P_3: J4.28 U14.M2
M5_L2P_3: J4.30 U14.M5
M13_L74P_1: J5.21 J6.12 U14.M13
M14_L74N_1: J5.23 J6.11 U14.M14
M15_L46P_1: J6.34 U14.M15
M16_L46N_1: J6.33 U14.M16
MSEL0: R60.1 U14.T11
MSEL1: R77.1 R78.2 U14.N11
N3_L34P_3: J4.26 U14.N3
N4_L2N_3: J4.29 U14.N4
N5_L49P_2: J4.18 J5.6 U14.N5
N12_IO_MISO2_2: R49.1 U9.3(W\P\(IO2)) U14.N12
P1_L33N_3: J4.23 J5.2 U14.P1
P2_L33P_3: J4.24 J5.1 U14.P2
P5_L49N_2: J4.17 J5.5 U14.P5
P6_L47P_2: J4.14 J5.10 U14.P6
P10_IO_DIN_MISO1_2: J4.7 U9.2 U14.P10
P12_IO_MISO3_2: R59.1 U9.7 U14.P12
P15_L48P_1: J6.30 U14.P15
P16_L48N_1: J6.29 U14.P16
PROGRAM_B_2: J4.10 R74.1 U14.T2
PULSE: R30.1 R40.1 TP11.1(TP) U5.5
PULSE_IN: TP23.1(TP) U6.8
PWR_IC: C8.1 C19.1 R34.1 TP8.1(TP) U2.2(V+)
PWR_IN: C11.1 L2.1 TP6.1(TP)
QUENCH_VOLTAGE_DOWN: R13.1 TP14.1(TP)
QUENCH_VOLTAGE_DWN_OUT: TP26.1(TP) U7.8
R1_L32N_3: J4.21 J5.4 U14.R1
R2_L32P_3: J4.22 J5.3 U14.R2
R3_IO_INIT_B_2: J4.8 R75.1 U14.R3
R5_L48P_2: J4.16 J5.8 U14.R5
R7_L32P_GCLK29_2: J4.12 J5.12 U14.R7
R9_L23P_2: J5.18 J6.4 U14.R9
R11_IO_CCLK_2: J4.5 R58.2 U9.6
R12_L52P_1: J5.13 J6.6 U14.R12
R14_L50P_1: J5.19 J6.10 U14.R14
R15_L49P_1: J6.24 U14.R15
R16_L49N_1: J6.23 U14.R16
RESET_DISCHARGE: R12.1 TP13.1(TP)
RESET_DISCHARGE_OUT: TP25.1(TP) U7.1
RXD: U14.M12 U16.9
SDRAM_A0: U13.23 U14.C11
SDRAM_A1: U13.24 U14.C10
SDRAM_A2: U13.25 U14.F9
SDRAM_A3: U13.26 U14.E11
SDRAM_A4: U13.29 U14.E10
SDRAM_A5: U13.30 U14.C8
SDRAM_A6: U13.31 U14.D9
SDRAM_A7: U13.32 U14.D8
SDRAM_A8: U13.33 U14.E8
SDRAM_A9: U13.34 U14.E7
SDRAM_A10: U13.22 U14.A11
SDRAM_A11: U13.35 U14.F7
SDRAM_A12: U13.36 U14.D6
SDRAM_BA0: U13.20 U14.A10
SDRAM_BA1: U13.21 U14.B10
SDRAM_DQ0: U13.2 U14.B3
SDRAM_DQ1: U13.4 U14.A3
SDRAM_DQ2: U13.5 U14.A4
SDRAM_DQ3: U13.7 U14.B5
SDRAM_DQ4: U13.8 U14.A5
SDRAM_DQ5: U13.10 U14.B6
SDRAM_DQ6: U13.11 U14.A6
SDRAM_DQ7: U13.13 U14.C7
SDRAM_DQ8: U13.42 U14.D5
SDRAM_DQ9: U13.44 U14.C3
SDRAM_DQ10: U13.45 U14.C2
SDRAM_DQ11: U13.47 U14.D1
SDRAM_DQ12: U13.48 U14.B1
SDRAM_DQ13: U13.50 U14.C1
SDRAM_DQ14: U13.51 U14.A2
SDRAM_DQ15: U13.53 U14.B2
SDRAM_LDQM: U13.15 U14.A7
SDRAM_NSCAS: U13.17 U14.A8
SDRAM_NSCS: U13.19 U14.C9
SDRAM_NSRAS: U13.18 U14.A9
SDRAM_NWE: U13.16 U14.B8
SDRAM_SCKE: U13.37 U14.C6
SDRAM_SCLK: U13.38 U14.E6
SDRAM_UDQM: U13.39 U14.C5
T3_CSO_B_2: R50.1 U9.1 U14.T3
T5_L48N_2: J4.15 J5.7 U14.T5
T6_L47N_2: J4.13 J5.9 U14.T6
T7_L32N_GCLK28_2: J4.11 J5.11 U14.T7
T8_IO_GCLK0_2: J4.9 U14.T8
T9_L23N_2: J5.17 J6.3 U14.T9
T10_IO_MOSI_MISO0_2: R57.2 U9.5
T12_L52N_1: J5.14 J6.5 U14.T12
T13_L51N_1: J5.16 J6.7 U14.T13
T14_L51P_1: J5.15 J6.8 U14.T14
T15_L50N_1: J5.20 J6.9 U14.T15
TXD: U14.P8 U16.8
USB_DM: J1.2 U16.2
USB_DP: J1.3 U16.1
VBIAS: R2.2 TP2.1(TP)
VQUENCH: Q1.2(S) R5.1 TP3.1(TP)
VQUENCH_PWR: C1.1 D3.1(K) R8.1 TP4.1(TP)
VREF: C7.1 R17.1 R19.2 R23.2
ZERO_CROSS: R56.1 U8.5 U17.8
N00177: Q3.1 U2.1
N00181: Q3.3(S) R27.1 U2.8
N00224: D1.2 L2.2 Q3.2
N00671: C13.1 U2.5
N03183: R34.2 R37.2 R39.2 U2.4
N10874: F2.1 J1.1
N20588: R72.2 Y1.3
N92203: R63.2 Y2.3
N141459: D9.1 R51.2
N147837: R73.1 U14.C4
N151004: R57.1 U14.T10
N151270: R58.1 U14.R11
N154888: R76.1 U14.L11
N154918: R79.2 U14.P14
N155350: D8.1 R45.1
N271586: C40.1 U16.10
N273444: R62.1 U16.6
N273448: D11.1 R62.2
N281531: C20.2 R25.2 R29.1 U2.3
N361468: R24.1 R28.1 R29.2
N365385: C4.1 C6.1 C17.1 L1.1 R22.1 R36.2 U1.5(VCC)
N365393: D3.2 L1.2 U1.6
N365573: R22.2 R35.2 U1.4
N365581: R8.2 R11.1 U1.3
N370992: D4.1(CATHODE) Q1.1 R5.2
N371048: D4.2 Q4.3
N371052: D2.1(K) D5.2 R4.2 R10.2
N371122: D2.2 Q1.3 R3.2
N371190: Q4.1 R13.2 R16.1
N371268: C3.2 D6.2(CATHODE) R10.1 R14.2
N371272: Q2.3 R4.1
N371414: Q2.1 R9.1 R12.2
N371666: C3.1 C5.2 R15.1
N372066: R19.1 R26.2 U3.1(REF) U3.3
N375383: R31.1 U5.1
N376175: R23.1 R30.2 U5.3
N379806: C9.1 R18.2 R20.1 R21.2
N380805: C5.1 R18.1 U4.3
N381019: R33.2 R38.2 U4.4
N381074: C14.2 R38.1 U4.1
N381200: C16.1 R33.1
N382559: C14.1 R31.2 R32.2
N382943: D5.1(K) R2.1
N383561: R36.1 TP16.1(TP)
N387558: R1.1 R6.1 R7.1
N387570: R1.2 R6.2 R7.2
N415847: R46.2 R47.2 T1.3
N415863: D7.2(CATHODE) R44.1 TP27.1(TP)
N415867: R44.2 T1.4
N415925: D7.1 T1.5 TP28.1(TP)
N417813: C25.2 C27.2 R47.1 R48.2
N417823: C27.1 D10.2(CATHODE) R53.1 U8.1
N419097: C28.1 R52.1 R53.2 R54.2 U8.3
N419105: R54.1 R55.2 U10.1(REF) U10.3
N427666: F1.2 TP29.1(TP)
N429095: D13.2(CATHODE) J3.3 R65.2

Pads without a net: J1 4; J2 12 14; T1 2; U13 40; U14 D3 E12 E13 F12 G11 H5 J6 J14 K5 K6 K11 K12 L7 L8 L10 L12 L13 M3 M4 M6 M7 M9 M10 M11 N6 N8 N9 N14 N16 P4 P7 P9 P11 T4; U16 4 5; Y1 1; Y2 1

## Via types
v1: diameter 0.711, hole 0.406, TOP to BOTTOM, 229 vias
v2: diameter 0.508, hole 0.305, TOP to BOTTOM, 4 vias
v3: diameter 0.457, hole 0.254, TOP to BOTTOM, 325 vias

## Routing (per net, layer and track width the routed paths; a pad name or vN(x,y) marks a point on that pad's centre or on a via; arc(x,y) is an arc through that point)
+1.2V: length 23.2
  TOP w0.406: U14.H10 v3(62,30.5) ; v3(59,32.5) U14.K8 ; v3(62,33.5) U14.G7 v3(63,33.5) ; v3(62,32.5) U14.H8 U14.G9 v3(63,30.5) ; U14.J9 v3(60,30.5) U14.K10 ; U14.J7 v3(60,33.5)
  L3_P w0.254: v3(59,32.5) 59,31.5 v3(60,30.5) 60.14,30.5 60.75,29.89 61.39,29.89 v3(62,30.5)
  BOTTOM w0.254: C73.1 v3(60,33.5)
  BOTTOM w0.38: v3(62,32.5) C75.1
  BOTTOM w0.406: U14.G7 v3(62,32.5) ; C77.1 v3(63,30.5) ; C64.1 v3(60,33.5) ; C80.1 v3(51.48,31.5) ; U14.J9 v3(60,30.5) ; U14.G9 v3(62,30.5) ; C73.1 v3(59,32.5) U14.K8 ; C63.1 v3(62,33.5) ; C68.1 v3(51.48,33.5) ; C87.1 v3(51.48,29.5) ; C66.1 v3(63,33.5)
  vias: v3(30.28,29.42) v3(30.28,28.4) v3(30.28,27.39) v3(30.28,26.37)
+2.5V:
  vias: v3(30.28,21.93) v3(30.28,20.91) v3(30.28,19.89) v3(30.28,18.88) v3(47.63,24.35) v3(47.63,23.56)
+3.3V: length 88.1
  TOP w0.127: 112.8,27.1 R61.1
  TOP w0.254: C35.1 42.43,31.22 42.39,31.17 arc(42.18,31.03) R59.2 ; v1(110.7,21.1) 110.12,21.69 110.12,22.58
  TOP w0.3: v1(49,58.6) 49.5,58.6 49.81,58.28 U6.3 ; v1(96.9,58.3) 96.88,58.28 U7.6 ; U7.3 89.89,58.28 v1(89.3,57.7) ; U6.6 56.12,58.28 57,57.4 v1(57.6,57.4) ; 110.12,26.98 110.12,27.62 110.9,28.4 v1(112.8,28.4)
  TOP w0.406: C35.1 v3(43.2,32.63) U9.8 ; v3(62.05,36.45) U14.G4 ; U14.N10 v3(57,29.5) ; U14.F11 v3(64,28.5) ; U13.49 v3(87.63,37.9) ; v3(66.08,29.42) U14.D10 ; U13.43 v3(87.63,33.1) ; R60.2 v3(49.56,28.15) ; R50.2 v3(42.55,43.91) ; U14.J2 60.92,38.42 v3(60.92,38.5) ; U14.B13 v3(67,27.5) ; U13.3 v3(78.72,40.3) ; U13.9 v3(78.72,35.5) ; U14.R4 v3(54,36.5) ; U14.F8 v3(64,31.5) ; U14.R8 v3(55,32.5) ; v3(68.44,44.15) 67.87,44.72 C26.1 Y1.4 ; v3(66,33.45) 65.95,33.45 U14.D7 ; U13.14 v3(78.72,31.5) ; U14.L9 v3(58,30.5) ; U13.1 v3(78.72,41.9) ; U14.E5 v3(65,35.5) ; R49.2 v3(39.68,43.91) ; U14.N7 v3(56,33.5) ; U14.J10 v3(60,29.5) ; U14.G10 v3(62,29.5) ; v3(68,36.55) 68,36.5 U14.B4 ; U14.H6 v3(61,34.5) ; U14.N2 v3(57,37.5) ; U14.B9 v3(68,31.5) ; U14.K4 v3(59,35.5) ; U14.D2 v3(66,38.5) ; U14.L6 v3(58,34.5) ; U13.27 v3(78.72,21.1)
  TOP w0.508: R66.2 v1(46.9,1.9)
  TOP w0.6: C23.1 48.2,58.3 48.5,58.6 v1(49,58.6) ; v1(110.7,21.1) C42.1 ; v1(57.6,57.4) C24.1 ; R64.2 v1(101.8,9.2) ; v1(89.3,57.7) 89,57.4 R43.1 ; R68.2 v1(69.1,1.7) ; R42.1 97.88,58.28 96.91,58.28 v1(96.9,58.3) ; R61.1 v1(112.8,28.4) ; R69.2 v1(79.9,1.8) ; R70.2 v1(90.9,1.7) ; R67.2 v1(57.8,1.8)
  BOTTOM w0.406: C55.1 v3(66,38.5) ; C74.1 v3(64,31.5) ; C86.1 v3(60,29.5) R76.2 ; C83.1 v3(58,30.5) R77.2 ; R82.1 v3(93.55,16.87) ; C78.1 v3(78.72,31.5) ; U14.G4 v3(62.05,36.45) ; v3(60.92,38.5) 61,38.58 C53.1 ; C65.1 v3(56,33.5) ; C71.1 v3(87.63,33.1) ; C62.1 v3(59,35.5) ; C61.1 v3(61,34.5) ; C79.1 v3(68,31.5) ; R74.2 R75.2 43.58,33.55 arc(43.48,33.05) v3(43.2,32.63) ; C51.1 v3(78.72,41.9) ; C52.1 v3(78.72,40.3) ; C54.1 v3(87.63,37.9) ; C85.1 v3(62,29.5) ; C60.1 v3(78.72,35.5) ; U14.B13 v3(67,27.5) ; U14.N10 v3(57,29.5) ; R71.2 v3(39.68,43.91) ; U14.L6 v3(58,34.5) ; C98.1 v3(78.72,21.1) ; C99.1 J2.2 ; C58.1 v3(54,36.5)
  vias: v3(30.28,36.91) v3(30.28,35.9) v3(30.28,34.88) v3(30.28,33.86) v3(47.63,22.77) v3(47.63,21.98) v3(51.01,38.5) v3(51.01,36.5) v3(55,41.5) v3(57,41.5) v3(65,41.5) v3(67,41.5) v3(71,38.5) v3(71,36.5) v3(71,26.5) v3(71,24.5)
+5V: length 28
  TOP w0.254: U16.7 v3(40.71,23.2)
  TOP w0.3: U6.7 v1(57.66,58.94) ; U17.7 109.47,28.16 111,29.7 v1(111.6,29.7) C36.2 ; v1(96.8,59.8) 95.94,58.94 U7.7
  TOP w0.406: C39.1 v3(40.71,23.2) ; R51.1 v3(38.52,44.56)
  TOP w0.6: C21.2 v1(96.8,59.8) ; C22.2 57.7,58.9 v1(57.66,58.94)
  BOTTOM w0.508: v3(28.25,24.29) 28.25,23.63 arc(28.4,23.27) 28.76,23.12 33.91,23.12 arc(34.23,23.06) 34.5,22.88 34.72,22.65 arc(34.93,22.51) 35.18,22.46 39.48,22.46 arc(39.92,22.54) 40.3,22.78 arc(40.31,22.79) 40.32,22.81 v3(40.71,23.2)
  vias: v1(15.6,18.9) v1(15.6,17.8) v1(15.6,16.7) v1(16.1,38.9) v1(16.1,37.47) v1(16.18,58.88) v1(17,38.1) v1(17.08,59.45) v1(17.9,38.9) v1(17.9,37.47) v1(18.07,58.91) v1(18.36,59.89) v1(19.5,49.5) v1(19.5,48.3) v1(20.5,49.4) v1(20.5,48.4) v1(69.6,58.4) v1(69.6,57) v1(70.7,58.4) v1(70.7,57) v1(102.3,64.9) v1(102.3,63.9) v1(102.3,62.9) v1(103.5,64.9) v1(103.5,63.9) v1(103.5,62.9) v1(109,34.8) v3(25.2,31.78) v3(25.2,24.29) v3(25.2,16.8) v3(26.22,31.78) v3(26.22,24.29) v3(26.22,16.8) v3(27.23,31.78) v3(27.23,24.29) v3(27.23,16.8) v3(28.25,31.78) v3(28.25,16.8) v3(34.17,44.51) v3(35.19,44.51) v3(35.62,46.49) v3(35.62,45.47)
GND: length 193.3
  TOP w0.147: U14.G8 v3(63,31.5)
  TOP w0.254: U14.E9 v3(65,31.5) ; U16.3 v3(41.21,27.64)
  TOP w0.3: U17.2 109.47,21.77 v1(108.9,21.2) ; U6.2 v1(52,58.94) ; U7.2 v1(91.9,58.94)
  TOP w0.406: U14.T1 v3(53,38.5) ; Y1.2 v3(62.58,46.32) ; U14.A1 v3(69,39.5) ; U14.H9 v3(61,30.5) ; v3(31.36,42.42) J1.5 v3(28.74,42.42) ; v3(26.32,21.39) U18.1 v3(27.94,22.28) ; C43.2 61.97,16.31 v3(62.04,16.23) ; v3(24.69,37.27) U11.1 v3(27.94,37.27) ; U14.D4 66,36.5 v3(66,36.55) ; v3(23.09,39.52) J1.S4 v3(25.41,39.52) ; U13.46 v3(90.62,35.5) ; U14.K7 v3(59,33.5) ; v3(28.59,39.52) J1.S2 v3(30.91,39.52) ; U14.R10 v3(54,29.5) ; U14.J8 v3(61,32.5) ; U14.J8 v3(60,31.5) ; U14.J8 v3(60,32.5) ; U14.J8 v3(61,31.5) ; U14.M8 v3(57,31.5) ; U13.54 v3(87.63,41.9) ; U14.A16 v3(69,23.5) ; U14.H7 v3(61,33.5) ; C26.2 67.06,43.72 v3(67,43.67) ; U14.P3 v3(55,37.5) ; U14.J5 v3(60,35.5) ; U13.52 v3(87.63,40.3) ; v3(23.09,48.52) J1.S3 v3(25.41,48.52) ; D11.2 v3(38.39,23.35) ; v3(24.69,29.78) U15.1 v3(27.94,29.78) ; U14.T16 v3(53,24.5) ; U13.12 v3(78.72,33.1) ; U9.4 v3(39.39,40.3) ; U14.D13 v3(66,26.5) ; U14.K9 v3(59,30.5) ; C39.2 v3(40.71,20.9) ; C40.2 v3(41.57,21.55) ; J1.S1 v3(28.59,48.52) ; U14.L2 v3(58,38.5) ; D8.2 v3(97.06,47.49) ; U14.R6 v3(55,33.5) ; U14.H12 v3(61,28.5) ; U14.G8 v3(63,32.5) ; U14.G15 v3(63,24.5) ; U13.28 v3(90.62,21.1) ; D9.2 v3(37.23,44.71) ; C35.2 v3(43.2,30.33) ; S1.2 v3(97.59,16.87) ; U14.L15 v3(58,24.5) ; v3(67.08,29.42) U14.B11 ; U13.41 v3(90.62,31.5) ; U14.G2 v3(62.05,37.55) ; U13.6 v3(78.72,37.9) ; U14.B7 v3(67,32.5) ; U14.N13 v3(56,26.5)
  TOP w0.5: v1(112.3,36.3) U8.6 111.2,37.2 110.25,38.15 U8.2
  TOP w0.508: J4.41 J4.42
  TOP w0.6: D13.1 v1(111.18,7.19) ; v1(21.2,32.11) C32.2 18.6,32.11 v1(18.4,31.91) U12.1 ; 9.01,38.6 v1(9.01,39.9) ; R56.2 v1(113.7,32.9) ; v1(8.7,21.51) C38.2 ; C24.2 v1(61.5,57.4) ; v1(107.8,31) C33.1 C34.1 ; C22.1 v1(61.5,58.9) ; C46.2 71.08,3.27 71.08,2.42 71.1,2.4 v1(71.1,1.7) ; C47.2 v1(82,1.8) ; D18.1 v1(95.19,1.81) ; R61.2 v1(115.6,27.2) ; v1(46,59.4) C23.2 ; C48.2 v1(93,1.8) ; C21.1 R42.2 v1(99.5,57.2) ; C36.1 v1(115.5,29.7) ; D14.1 v1(50.99,1.9) ; C45.2 v1(59.9,1.8) ; D17.1 v1(84.09,1.8) ; 14.49,38.6 v1(14.49,39.9) ; 19.9,38.29 v1(19.9,40) ; R43.2 v1(85.4,57.4) ; C42.2 v1(109.6,18.4) ; C28.2 v1(107.7,43.9) ; D12.1 v1(101.91,7.21) ; D16.1 v1(73.19,1.7) ; C44.2 v1(48.9,1.9) ; D15.1 v1(61.99,1.79) ; R52.2 v1(106.1,43.9)
  TOP w0.8: v1(110.47,50.6) T1.1 v1(111.5,49.36) ; R48.1 v1(112.1,45.8) ; C25.1 v1(112.1,44.3) ; R46.1 v1(112.1,47.3)
  L2_GND w0.127: v3(63,32.5) v3(61,30.5)
  L2_GND w0.254: 66,37.55 65.97,37.55 65.01,38.51 ; 53.96,27.54 55,26.5 v3(56,26.5) ; 63.88,32.46 64.04,32.46 v3(65,31.5)
  L3_P w0.254: v1(2.5,82) v1(2.5,83.5) v1(2.5,85) v1(2.5,86.5) v1(2.5,88) v1(2.5,89.5) v1(2.5,91)
  BOTTOM w0.406: C99.2 v3(94.13,19.24) ; C55.2 v3(66,36.55) ; C86.2 v3(61,30.5) U14.H9 ; C102.2 v3(30.28,17.89) ; v3(28.5,26.37) C90.2 ; U14.K9 v3(59,30.5) ; v3(59,30.5) C83.2 ; v3(59,30.5) R78.1 ; C52.2 v3(81.04,40.3) ; C75.2 v3(61,31.5) ; v3(61,28.5) C85.2 ; v3(73.03,24.5) C92.2 v3(73.03,26.5) ; v3(65,19.33) C100.2 v3(67,19.33) ; R79.1 v3(56,26.5) 56.45,26.05 C96.2 ; v3(62.05,37.55) 62.5,37.1 C59.2 ; C94.2 v3(63,24.5) ; C80.2 v3(47.9,31.5) ; U14.R6 v3(55,33.5) ; v3(73.03,38.5) C56.2 v3(73.03,36.5) R73.2 ; C62.2 v3(60,35.5) U14.J5 ; C77.2 v3(63,31.5) ; C93.2 v3(66,26.5) C88.2 ; C69.2 v3(30.28,32.87) ; v3(57,19.33) C101.2 v3(55,19.33) ; C54.2 v3(85.3,37.9) ; C98.2 v3(81.04,21.1) ; C64.2 v3(59,33.5) C67.2 ; C51.2 v3(81.04,41.9) ; C71.2 v3(85.3,33.1) ; U14.J8 v3(60,31.5) ; C60.2 v3(81.04,35.5) ; v3(28.5,33.86) C70.2 ; C63.2 v3(61,33.5) ; C79.2 v3(70.35,31.5) ; v3(57,43.67) C50.2 v3(55,43.67) ; C74.2 v3(65,31.5) ; C87.2 v3(47.9,29.5) ; C78.2 v3(81.04,31.5) ; C97.2 v3(47.9,25.5) ; C57.2 v3(47.9,37.5) ; C66.2 v3(63,32.5) ; U14.L15 v3(58,24.5) ; C84.2 v3(57,31.5) ; C68.2 v3(47.9,33.5) ; C91.2 v3(53,24.5) ; v3(55,37.5) U14.P3 ; C53.2 v3(61,40.85) ; v3(67,43.67) C49.2 v3(65,43.67) ; U14.H7 v3(61,32.5) ; C73.2 v3(60,32.5) ; C103.2 v3(28.5,18.88) ; v3(30.28,25.38) C89.2
  BOTTOM w0.508: J4.41 J4.42 ; 26.71,48.87 J4.4 J4.3
  vias: v1(2.5,80.5) v1(2.5,79) v1(2.5,77.5) v1(2.5,76) v1(2.5,74.5) v1(2.5,73) v1(2.5,71.5) v1(2.5,70) v1(2.5,68.5) v1(2.5,67) v1(2.5,65.5) v1(2.5,64) v1(2.5,62.5) v1(18,22) v1(18,20.8) v1(47.5,85.5) v1(47.5,84) v1(47.5,82.5) v1(47.5,81) v1(47.5,79.5) v1(47.5,78) v1(47.5,76.5) v1(47.5,75) v1(47.5,73.5) v1(47.5,72) v1(47.5,70.5) v1(47.5,69) v1(47.5,67.5) v1(47.5,66) v1(47.5,64.5) v1(104,37.9) v1(104,35.9) v1(114.5,42.99) v3(27.17,15.02) v3(35.45,39.3) v3(37.23,36.91) v3(37.43,27.77) v3(37.43,25.12) v3(37.38,21.44) v3(37.4,17.86) v3(61.96,19.76) v3(91.71,23.55) v3(91.73,18.93) v3(91.91,28.12) v3(91.96,33.58) v3(92.11,39.78) v3(95.52,20.88) v3(95.62,15.07)
GND_FIELD SIGNAL: length 29.2
  TOP w0.6: U3.2 v1(61.11,75.88) ; R40.2 v1(60.1,69) ; U5.6 v1(60.1,71) ; Q4.2 85.6,82.9 85.5,82.8 R16.2 v1(85.5,80.9) ; R21.1 v1(69.9,76.1) ; v1(55.7,73) C15.2 C18.2 ; R17.2 v1(58.4,81.3) ; U5.2 64.41,71.94 v1(65.64,71.94) ; C12.2 v1(83.51,75.8) ; C16.2 v1(79.88,72.8) ; R15.2 v1(74.14,82) ; C9.2 v1(74.2,77.3) ; v1(71.3,90.9) 71.7,90.5 R3.1 ; Q2.2 72.7,87.1 72.8,87 R9.2 v1(74.7,87) ; C10.2 v1(83.51,77.3) ; R32.1 v1(71.6,75.9) ; C7.2 v1(64.7,79.1) ; U4.2 74.65,75.05 v1(74.4,74.8) ; R14.1 v1(62.1,80.8) ; D6.1 v1(66.4,85.8)
GND_HVPS:
  vias: v1(13.1,71.18) v1(14.04,71.16) v1(14.23,71.98) v1(16.1,79.9) v1(16.1,77.8) v1(16.8,78.9) v1(17.4,79.9) v1(17.5,77.8) v1(18.2,78.9) v1(18.9,79.9) v1(19,77.8) v1(19.7,78.9) v1(20.1,80.1) v1(21.4,80.2) v1(21.65,68.08) v1(21.74,69.53) v1(22.41,68.81) v1(23.15,69.56) v1(23.15,68.1) v1(30.4,75.9) v1(33.6,81.5) v1(33.6,80.3) v1(33.6,79.1) v1(34.7,77.6) v1(34.9,81.5) v1(34.9,80.3) v1(34.9,79.1) v1(36.1,81.5) v1(36.1,80.3) v1(36.1,79.1) v2(37.3,73.3) v2(37.3,72.4) v2(38,73.3) v2(38,72.4)
GND_QUENCH:
  vias: v1(91.6,82.4) v1(91.6,80.9) v1(92.7,82.4) v1(92.7,80.9) v1(93.9,82.4) v1(93.9,80.9) v1(94.8,80.2) v1(95.1,81.3) v1(95.3,79.3) v1(101.8,84.1) v1(101.78,82.8) v1(101.8,81.6) v1(103,84.1) v1(103,82.8) v1(103,81.6) v1(104.4,82.2) v1(112.4,70.7) v1(112.9,68.3) v1(113.5,70.7) v1(113.6,69.3) v1(114.4,77.7) v1(114.4,76.4) v1(114.4,74.3) v1(114.4,73.2) v1(114.7,70.7) v1(114.8,69.3) v1(115,75.4) v1(115.3,68.2) v1(115.7,82.2) v1(115.7,81.2) v1(115.7,80.2) v1(115.7,79) v1(115.7,77.7) v1(115.7,76.4) v1(115.7,74.3) v1(115.7,73.2) v1(115.8,70.7)
VCCIO: length 9.4
  TOP w0.406: v3(60.36,17.56) C43.1 ; U14.G13 v3(63,26.5) ; U14.N15 v3(56,24.5) ; U14.K13 v3(59,26.5) ; U14.R13 v3(54,26.5) ; U14.J15 v3(60,24.5) ; U14.D15 v3(66,24.5)
  BOTTOM w0.406: v3(56,24.5) 56.45,24.95 C96.1 ; C93.1 v3(66,24.5) ; C94.1 v3(63,26.5) ; C95.1 v3(59,26.5) ; C91.1 53.71,26.21 v3(54,26.5)
  vias: v3(51.01,25.5) v3(51.01,24.5) v3(51.01,23.5) v3(55,21.5) v3(57,21.5) v3(65,21.5) v3(67,21.5)
VDD5_LCD:
  vias: v1(7.77,19.1) v1(7.78,17.55) v1(8.37,18.31) v1(8.96,19.06) v1(9.02,17.54)
VDD5_QUENCH: length 2.3
  TOP w0.6: R26.1 v1(54.7,74) ; R20.2 v1(67.1,77.2)
  vias: v1(59.5,73.4) v1(60.3,73) v1(78.33,77.41) v1(79.1,77.07) v1(79.86,77.38) v1(79.88,75.93)
VDD33:
  vias: v1(7.84,34.49) v1(7.8,23.9) v1(8.1,31.6) v1(8.4,23.1) v1(8.73,33.79) v1(8.9,23.9) v1(9.4,31.6) v1(10.8,31.6)
A12_L62N_0: length 68.6
  TOP w0.127: U17.4 110.77,24.49 110.89,24.61 111.69,24.61 112.6,23.7 112.6,17.6 110.5,15.5 103.6,15.5 99.4,11.3 96.7,11.3 95.55,12.45 J6.57 95.29,11.47 arc(95.25,11.38) 95.16,11.34 94.82,11.34 arc(94.34,11.54) 94.15,12.01 94.15,12.71 94.15,12.71 arc(94.14,12.73) 94.14,12.75 arc(94.02,13.05) 93.82,13.31 93.47,13.66 arc(93.42,13.79) 93.47,13.93 93.48,13.93 arc(93.63,14.3) 93.48,14.67 arc(93.11,14.82) 92.74,14.67 92.73,14.66 arc(92.6,14.61) 92.47,14.66 88.22,18.91 arc(86.88,19.81) 85.3,20.12 80.02,20.12 arc(79.89,20.18) 79.83,20.31 79.83,20.46 arc(79.64,20.65) 79.45,20.46 79.45,20.31 arc(79.39,20.18) 79.26,20.12 78.06,20.12 arc(76.57,20.42) 75.3,21.26 75.12,21.44 arc(75.07,21.58) 75.12,21.71 arc(75.18,21.84) 75.12,21.98 75.12,21.98 arc(74.98,22.03) 74.85,21.98 74.85,21.98 arc(74.72,21.92) 74.58,21.98 72.86,23.7 arc(72.15,24.77) 71.9,26.03 71.9,26.29 arc(71.82,26.68) 71.6,27 71.3,27.31 arc(70.73,27.68) 70.07,27.82 68.94,27.82 arc(68.7,27.86) U14.A12
A13_L63N_0: length 37.9
  TOP w0.127: J6.55 92.75,11.47 arc(92.71,11.38) 92.62,11.34 91.89,11.34 arc(91.8,11.38) 91.76,11.47 91.76,13.57 arc(91.51,14.18) 90.9,14.43 arc(90.57,14.3) 90.44,13.97 arc(90.4,13.88) 90.31,13.85 arc(90.04,13.96) 89.93,14.23 89.93,15.1 arc(89.76,15.97) 89.27,16.71 87.75,18.22 arc(86.72,18.91) 85.5,19.16 76.22,19.16 arc(75.6,19.28) 75.08,19.63 72.8,21.91 arc(72.74,22.05) 72.8,22.18 72.88,22.27 arc(72.88,22.54) 72.62,22.54 72.53,22.45 arc(72.26,22.45) 72.26,22.72 72.35,22.81 arc(72.35,23.08) 72.08,23.08 71.99,22.99 arc(71.72,22.99) 71.72,23.26 71.81,23.35 arc(71.81,23.61) 71.54,23.61 71.45,23.53 arc(71.32,23.47) 71.18,23.53 70.7,24.01 arc(70.61,24.15) 70.58,24.31 70.58,26.18 arc(70.39,26.64) 69.93,26.83 68.85,26.83 arc(68.69,26.86) 68.55,26.95 U14.A13
A14_L65N_0: length 37.9
  TOP w0.127: U14.A14 68.58,25.92 arc(68.7,25.84) 68.85,25.81 69.31,25.81 arc(69.63,25.68) 69.76,25.35 69.76,23.12 arc(69.8,22.92) 69.92,22.74 70.3,22.36 arc(70.44,22.31) 70.57,22.36 70.61,22.4 arc(70.88,22.4) 70.88,22.13 70.84,22.09 arc(70.84,21.82) 71.11,21.82 71.15,21.86 arc(71.42,21.86) 71.42,21.6 71.38,21.55 arc(71.32,21.42) 71.37,21.29 71.95,20.72 arc(72.08,20.66) 72.21,20.72 72.25,20.76 arc(72.62,20.91) 72.99,20.76 arc(73.14,20.39) 72.99,20.02 72.95,19.98 arc(72.95,19.71) 73.22,19.71 73.26,19.75 arc(73.63,19.9) 74,19.75 arc(74.15,19.38) 74,19.01 73.96,18.97 arc(73.9,18.84) 73.96,18.7 74.33,18.33 arc(74.54,18.19) 74.79,18.14 86.3,18.14 arc(86.58,18.08) 86.82,17.92 88.77,15.97 arc(89.01,15.62) 89.09,15.19 89.09,14.94 arc(88.94,14.57) 88.57,14.42 87.81,14.42 arc(87.62,14.23) 87.81,14.04 88.57,14.04 arc(88.94,13.88) 89.09,13.52 89.09,11.47 arc(89.13,11.38) 89.22,11.34 90.08,11.34 arc(90.17,11.38) 90.21,11.47 J6.53
B12_L62P_0: length 69.6
  TOP w0.127: U17.5 110.77,25.07 110.89,24.95 111.82,24.95 112.93,23.84 112.93,17.46 110.64,15.17 103.74,15.17 99.54,10.97 96.7,10.97 95.64,9.91 J6.58 95.29,10.89 arc(95.25,10.98) 95.16,11.01 94.82,11.01 arc(94.11,11.31) 93.82,12.01 93.82,12.67 arc(93.73,12.89) 93.59,13.07 93.24,13.43 arc(93.09,13.79) 93.24,14.16 93.24,14.17 arc(93.3,14.3) 93.24,14.44 93.24,14.44 arc(93.1,14.49) 92.97,14.44 92.97,14.43 arc(92.6,14.28) 92.23,14.43 87.99,18.68 arc(86.75,19.5) 85.3,19.79 78.06,19.79 arc(76.44,20.11) 75.07,21.03 72.63,23.47 arc(71.84,24.64) 71.57,26.03 71.57,26.29 arc(71.51,26.55) 71.37,26.77 71.07,27.07 arc(70.61,27.38) 70.07,27.49 68.74,27.49 arc(68.07,27.62) U14.B12
B14_L65P_0: length 60.8
  TOP w0.127: R64.1 105.2,9.4 104.3,10.3 101.4,10.3 98.8,7.7 92.1,7.7 90.21,9.59 J6.54 90.21,10.89 arc(90.17,10.98) 90.08,11.01 89.22,11.01 arc(88.9,11.15) 88.76,11.47 88.76,13.52 arc(88.71,13.65) 88.57,13.71 87.81,13.71 arc(87.29,14.23) 87.81,14.75 88.57,14.75 arc(88.71,14.8) 88.76,14.94 88.76,15.19 arc(88.7,15.49) 88.54,15.74 86.58,17.69 arc(86.45,17.78) 86.3,17.81 74.79,17.81 arc(74.42,17.88) 74.1,18.1 73.72,18.47 arc(73.57,18.84) 73.72,19.21 73.76,19.25 arc(73.82,19.38) 73.77,19.51 73.76,19.52 arc(73.63,19.57) 73.49,19.52 73.45,19.48 arc(72.72,19.48) 72.72,20.21 72.76,20.25 arc(72.81,20.38) 72.76,20.52 72.76,20.52 arc(72.62,20.58) 72.49,20.52 72.45,20.48 arc(72.08,20.33) 71.71,20.48 69.69,22.51 arc(69.5,22.79) 69.43,23.12 69.43,25.35 arc(69.4,25.44) 69.31,25.48 68.75,25.48 arc(68.08,25.62) U14.B14
  TOP w0.4: R64.1 105.2,7.48 arc(105.23,7.33) D12.2 105.31,4.17 arc(105.32,4.13) J3.2
